# Altium PCB PCB1.PcbDoc
Units mil, origin at the board's own origin, x right, y up, seen from the top; angles counter-clockwise.
Board outline 3935 x 3935 mil, 4 copper layers (Top Layer, Layer 2, Layer 3, Bottom Layer), stack 71.573 mil thick; 112 components, 115 nets, 407 pads, 81 vias.
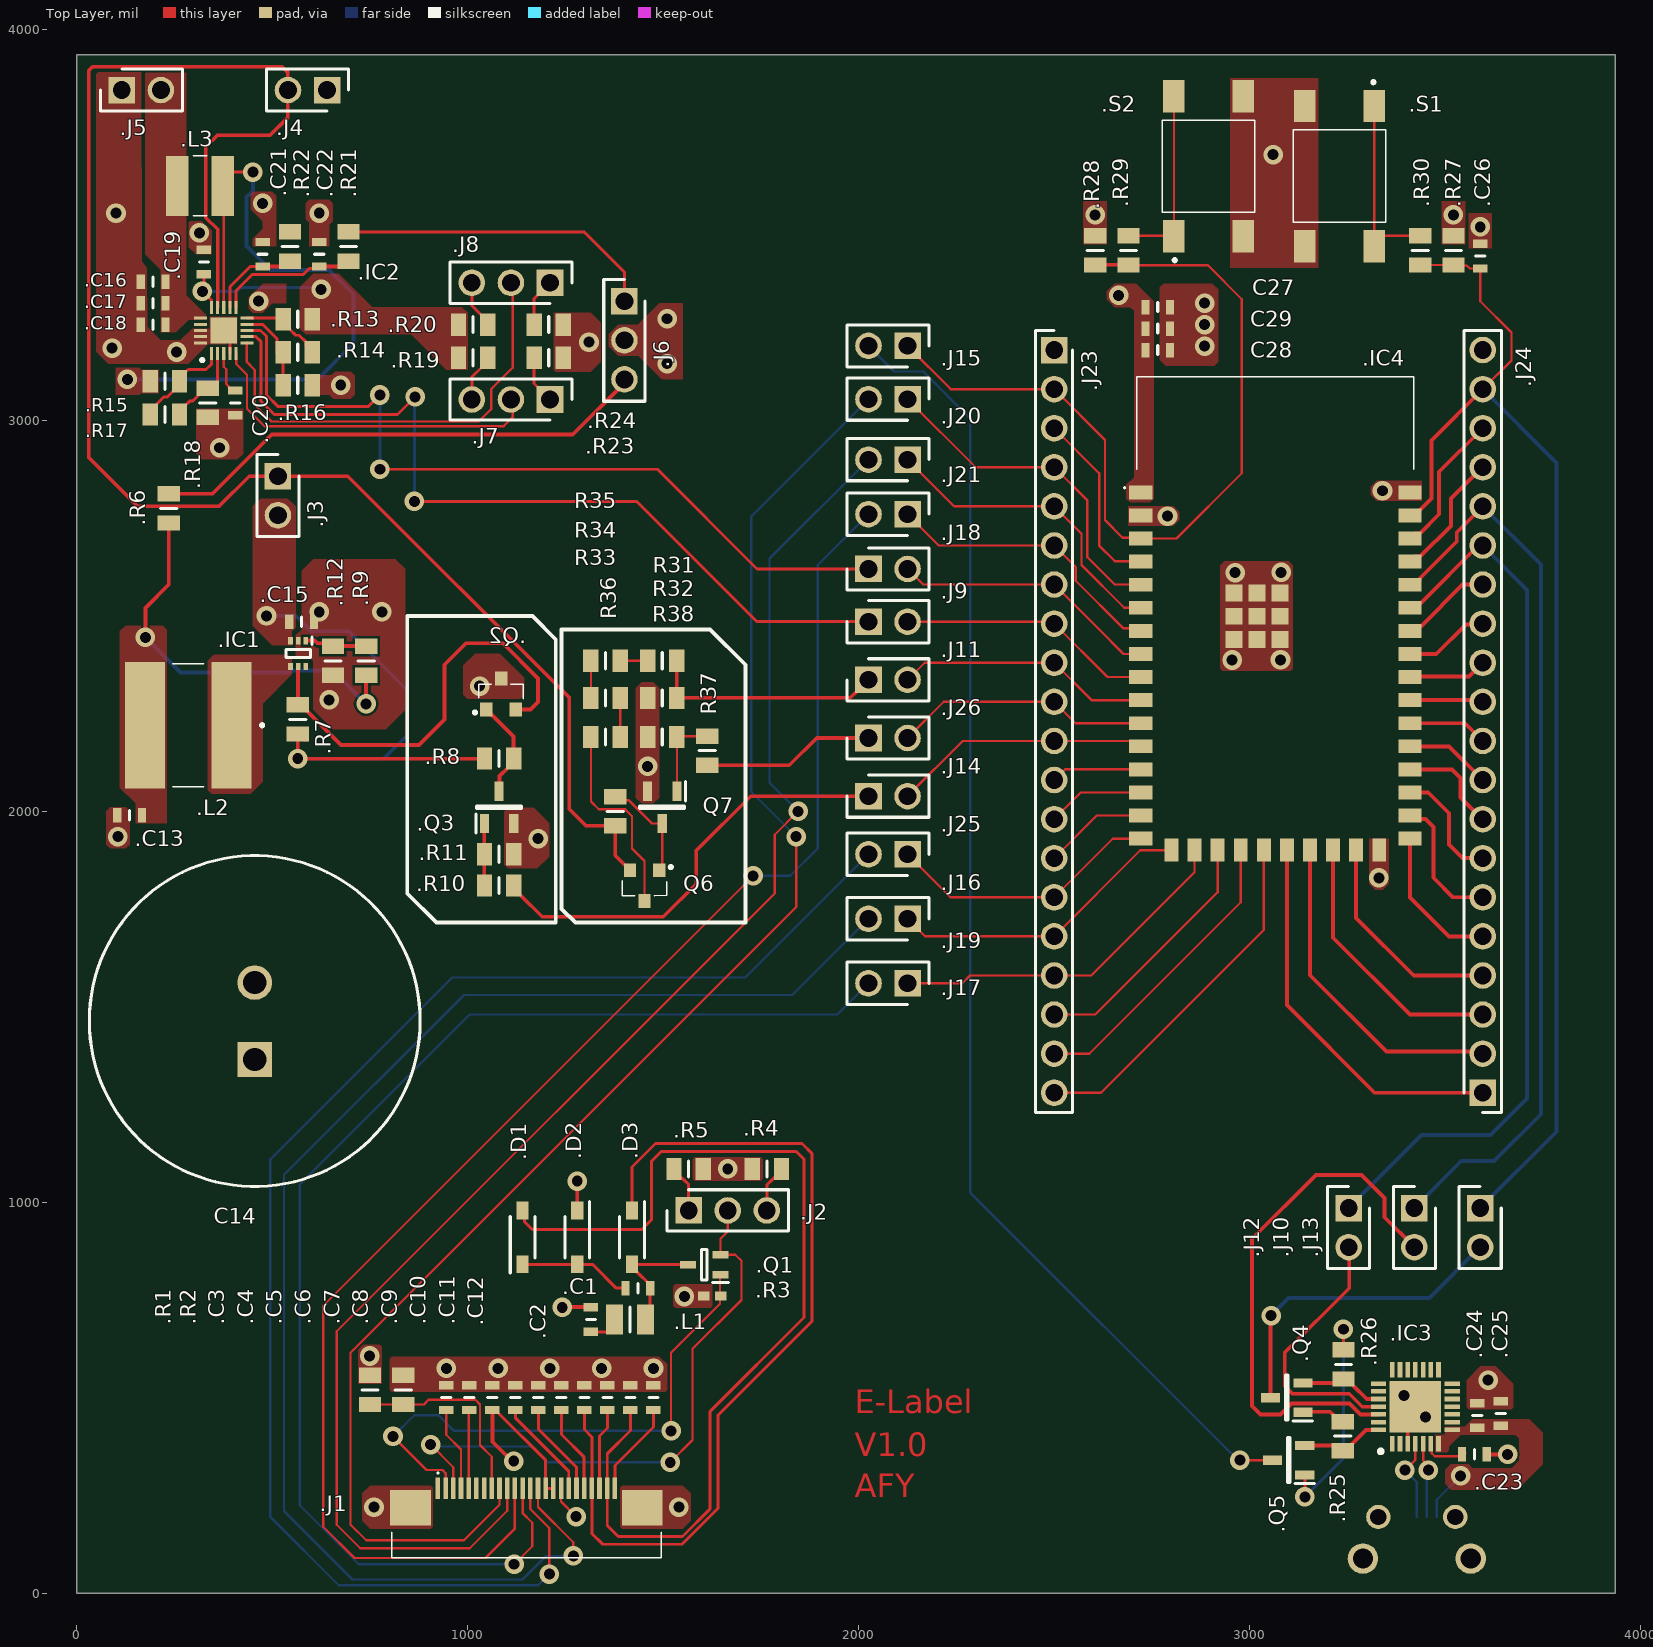
[diagram p0: Top Layer view]
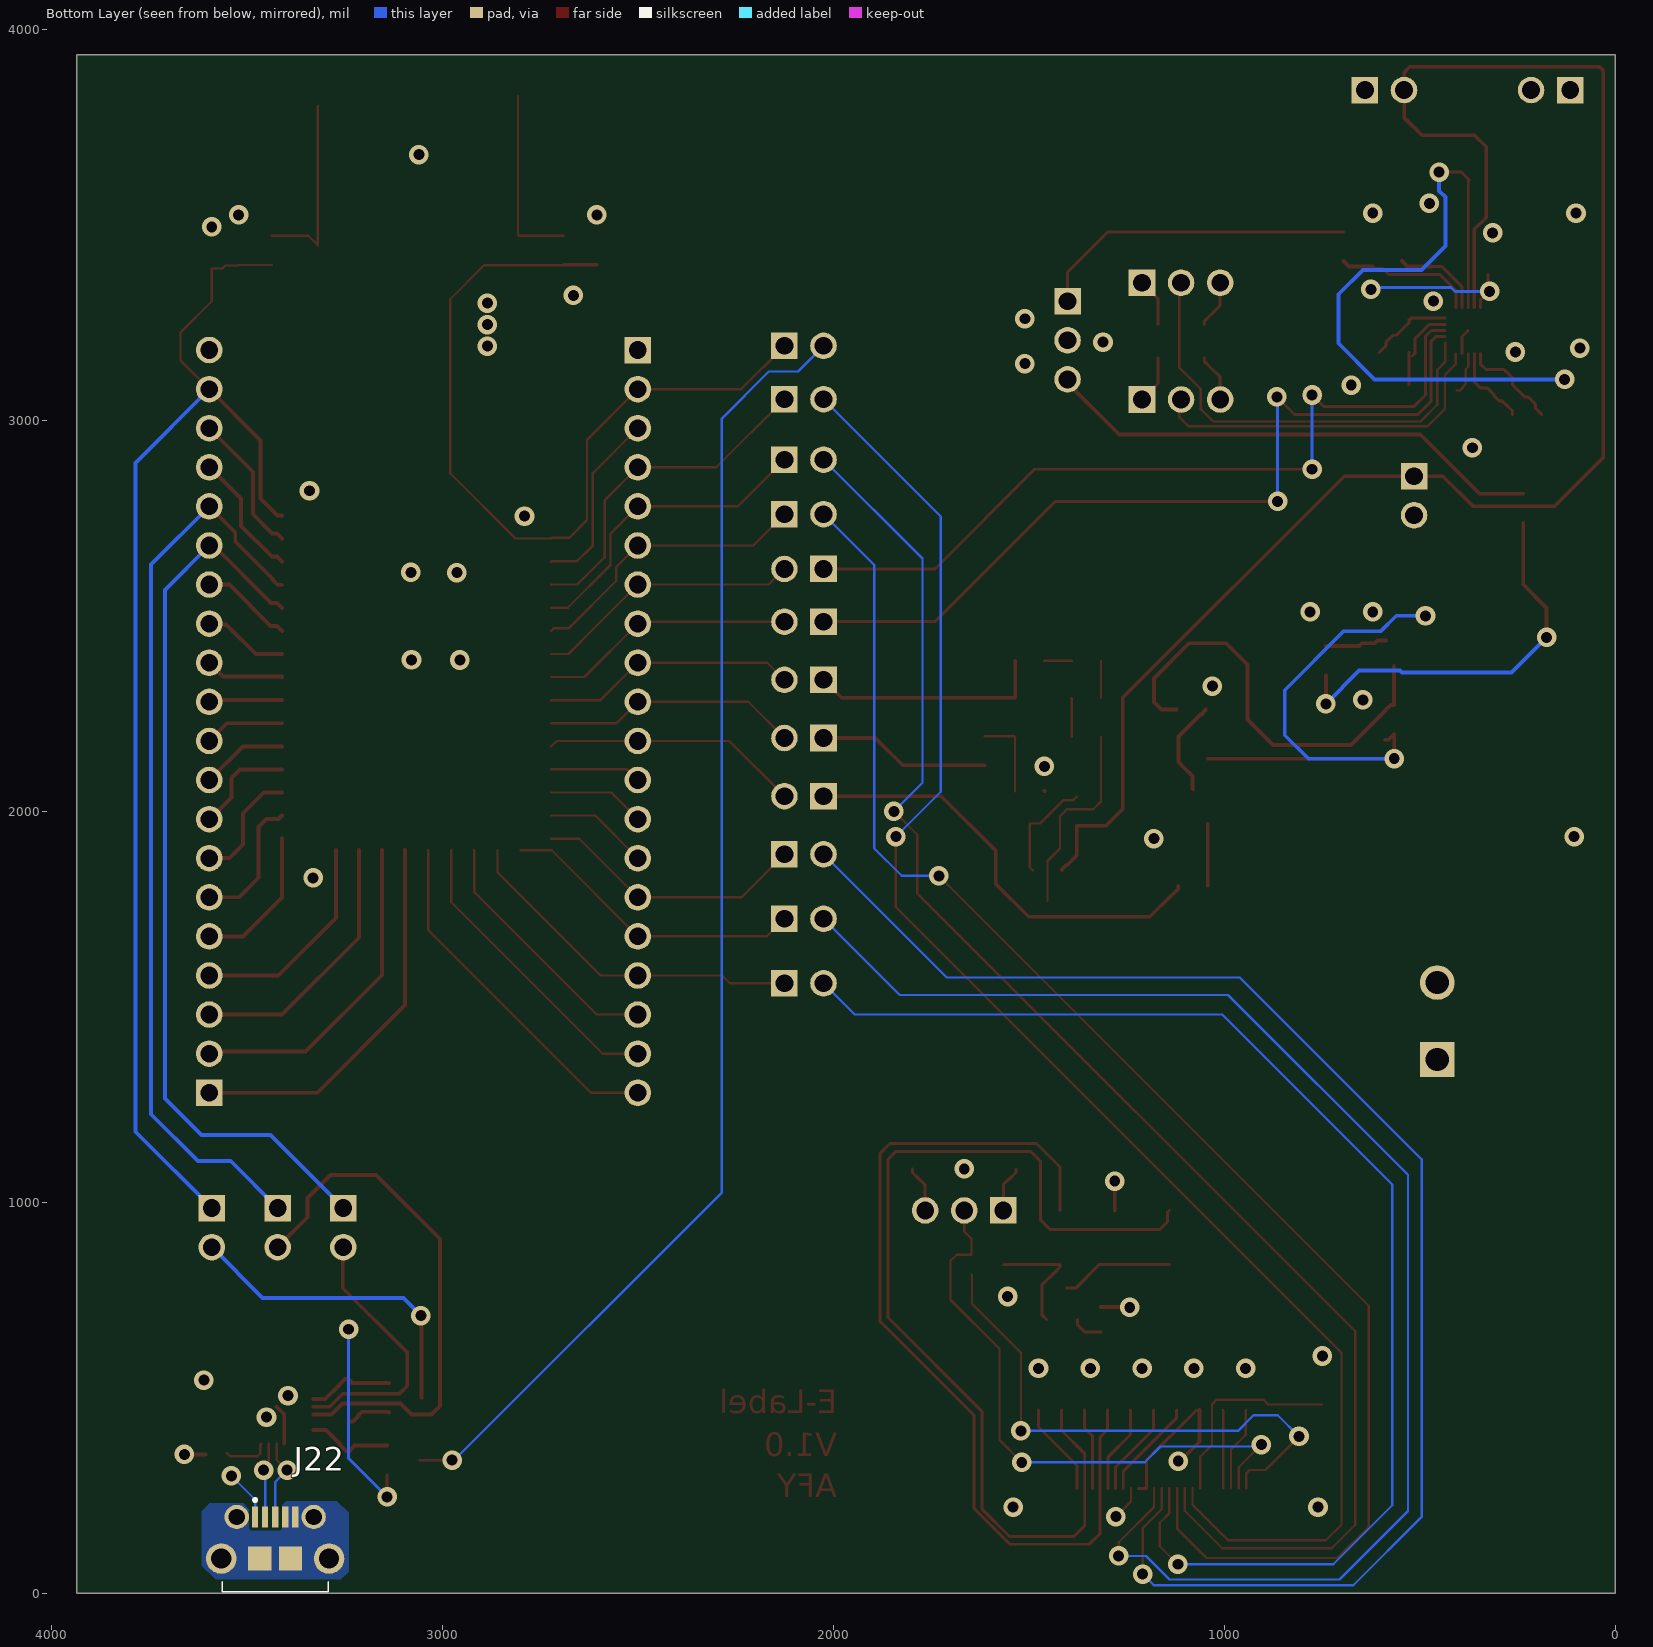
[diagram p1: Bottom Layer view, seen from below]
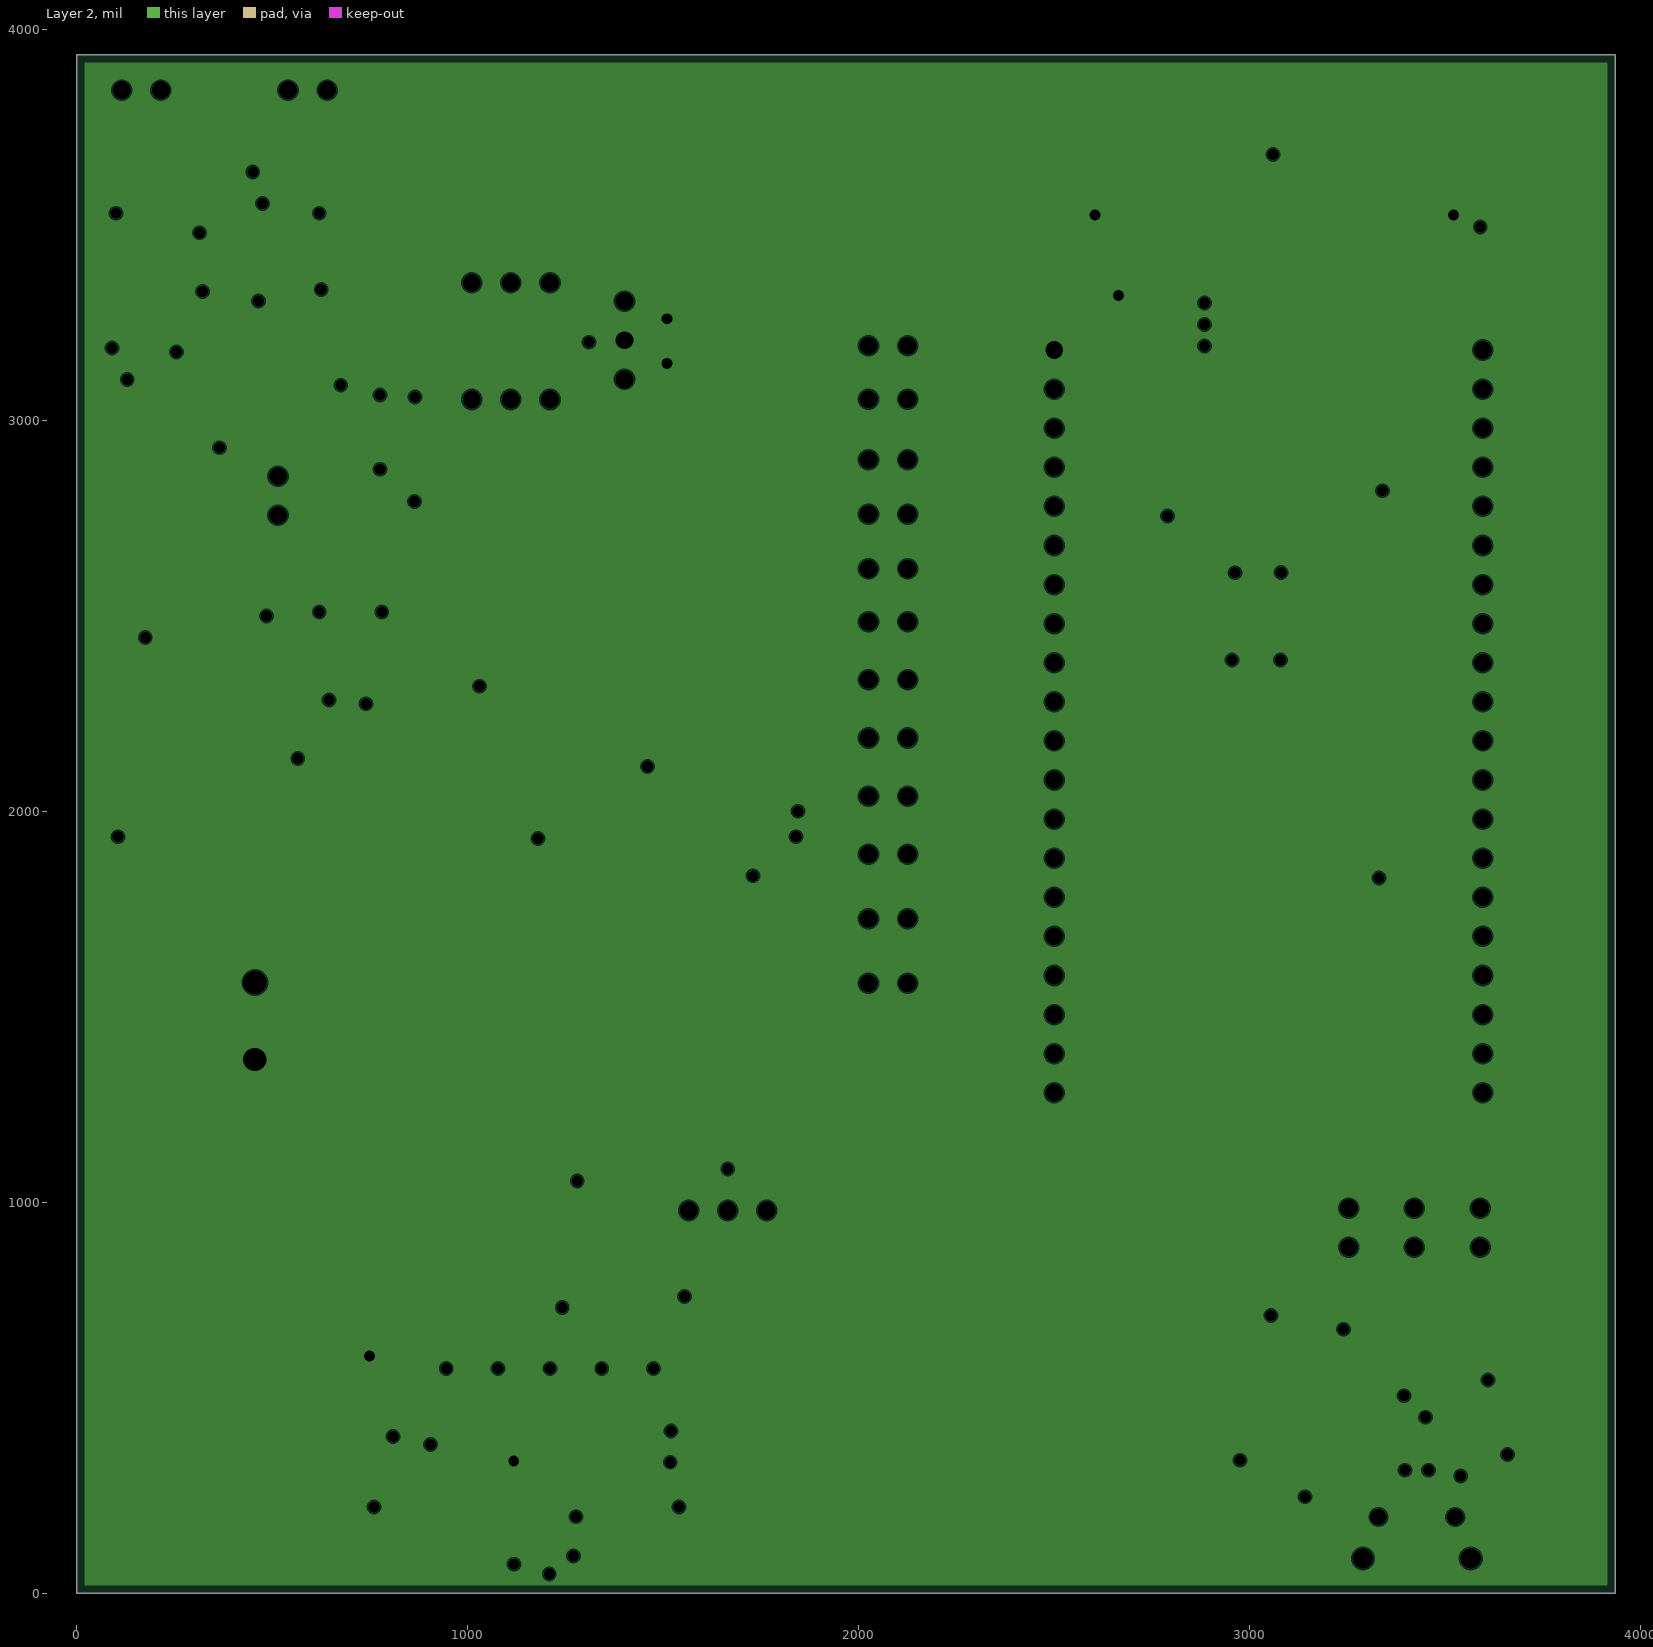
[diagram p2: Layer 2, clearances drawn from the general rule]
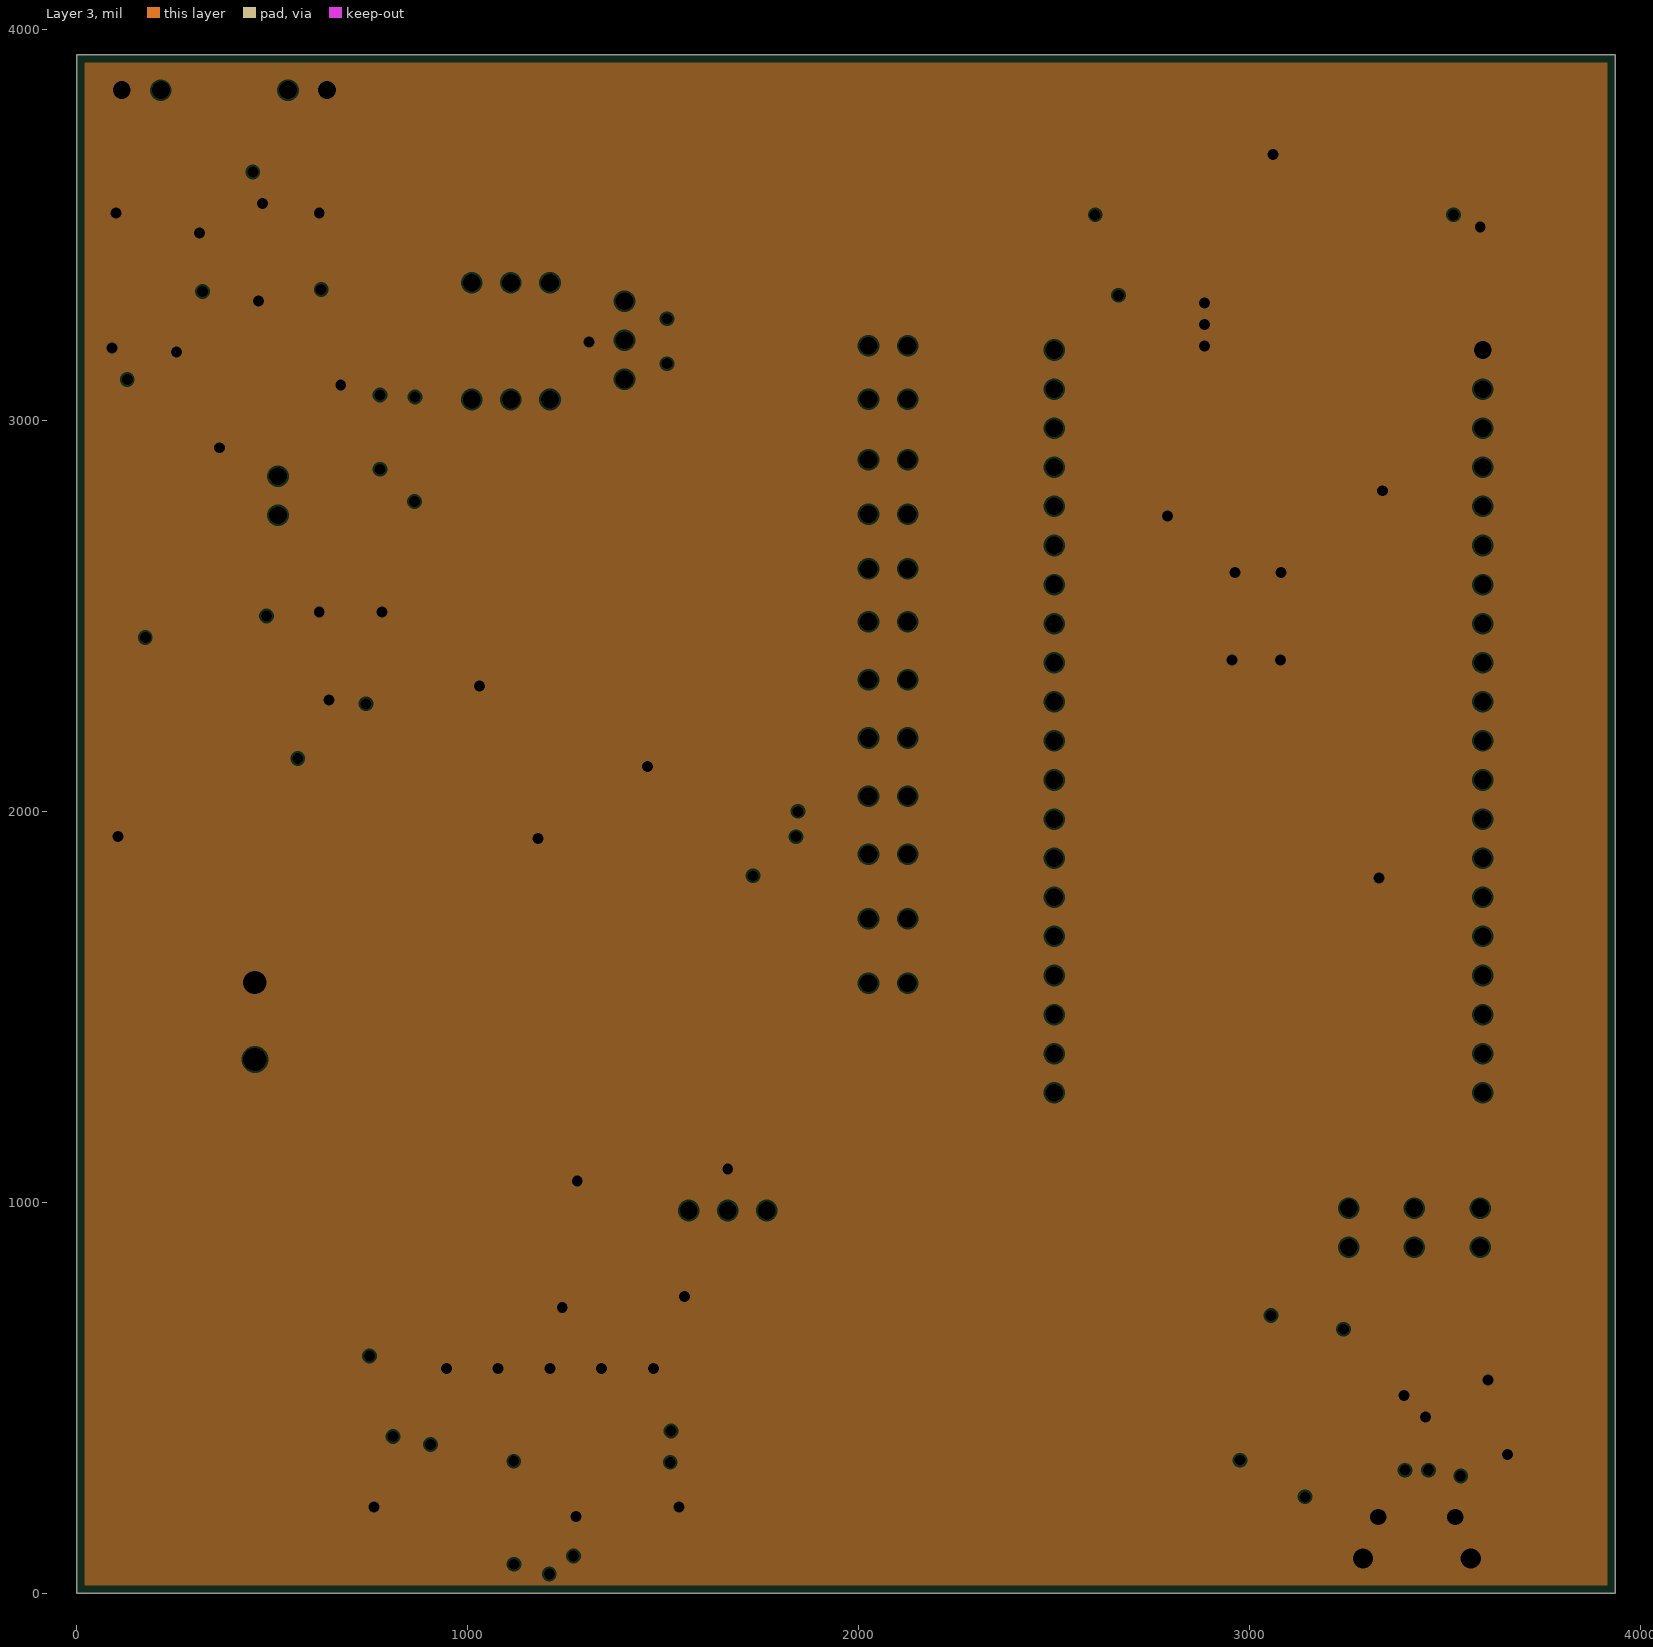
[diagram p3: Layer 3, clearances drawn from the general rule]
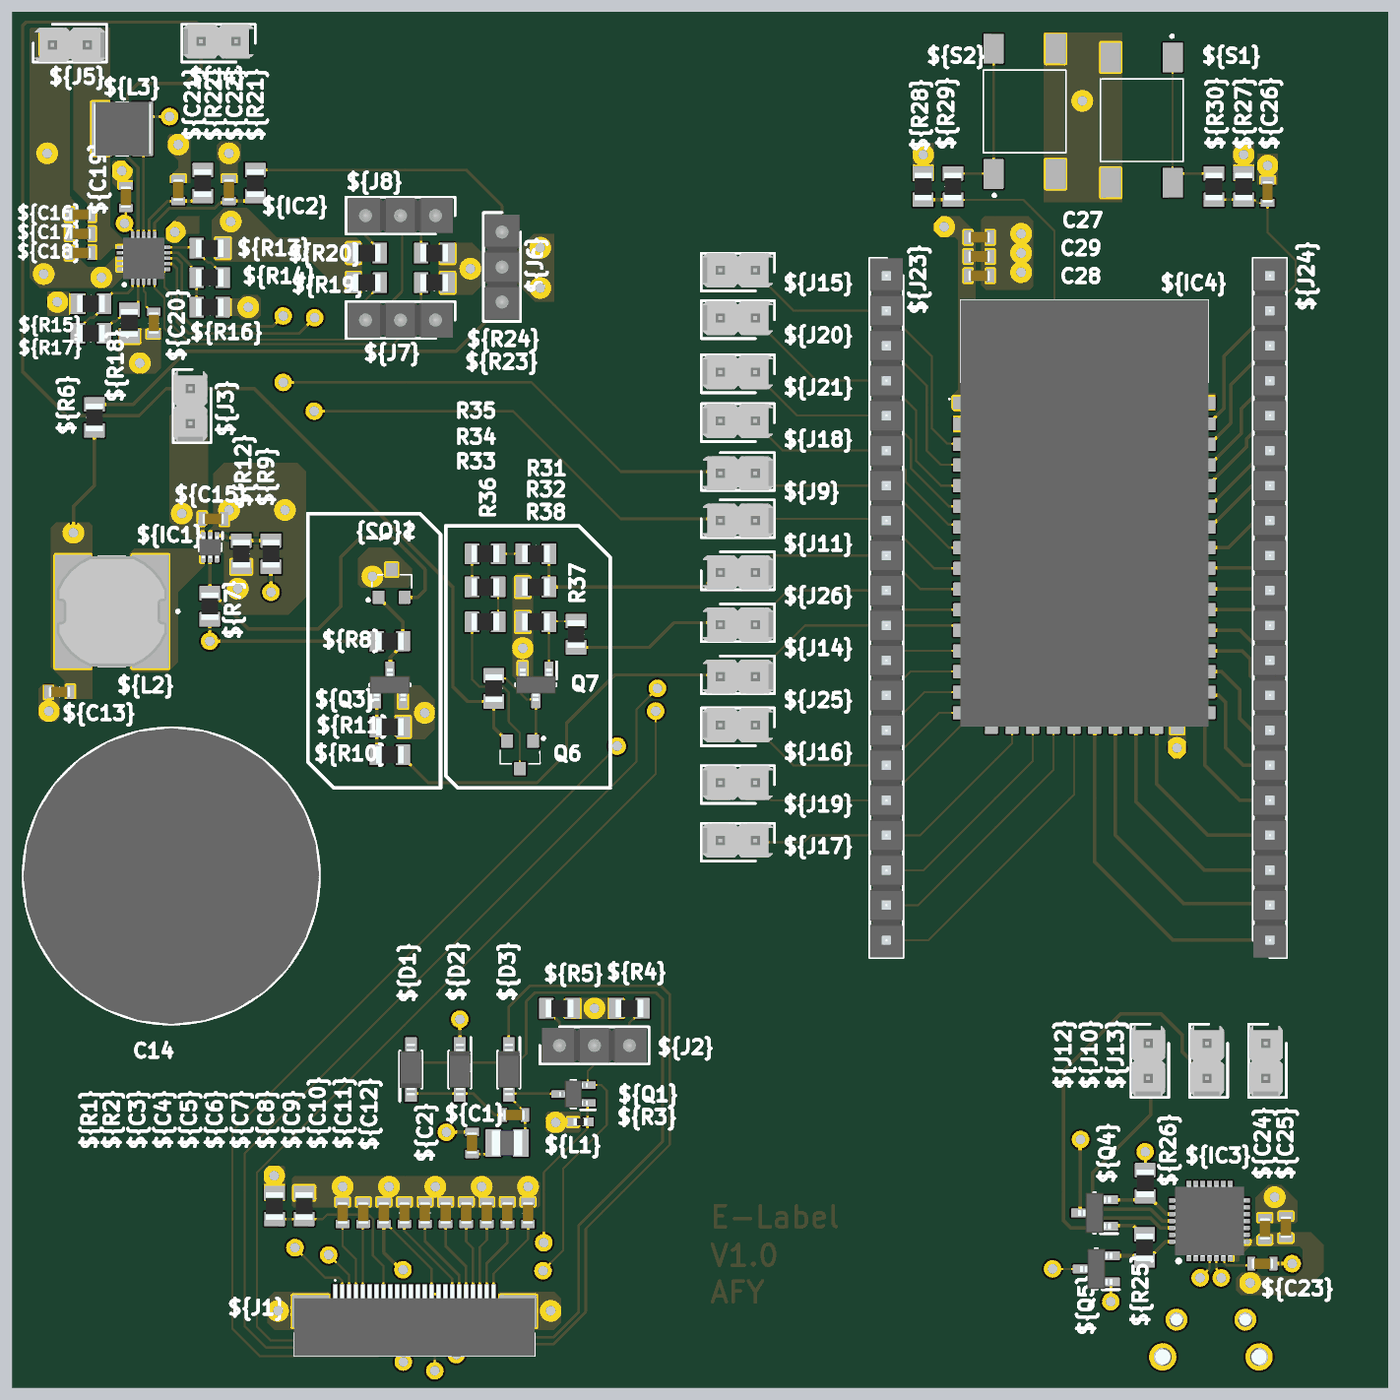
[diagram p4: 3D render of the assembled board from above, using the file's embedded part models]

## Layer stack, top to bottom
Top Solder: solder mask 0.4, Solder Resist, Dk 3.5
Top Layer: signal copper 1.378
Dielectric 2: prepreg 4.2, PP-014, Dk 4.2
Layer 2: plane copper 0.7087, net VDD_3V3
Dielectric 1: core 59, Core-043, Dk 4.3
Layer 3: plane copper 0.7087, net GND
Dielectric 3: prepreg 4.2, PP-014, Dk 4.2
Bottom Layer: signal copper 1.378
Bottom Solder: solder mask 0.4, Solder Resist, Dk 3.5

## Board outline
0,0 0,3935 3935,3935 3935,0

## Design rules (kind name [scope] priority, off if disabled: settings)
Clearance polygon [All] p1: gap=6 ignorepadtopadclearanceinfootprint=FALSE
Clearance polygon2SameNet [All] p2: gap=0 ignorepadtopadclearanceinfootprint=FALSE
Clearance [All] p3: gap=6 ignorepadtopadclearanceinfootprint=FALSE
MinimumSolderMaskSliver [All] p1: minsoldermaskwidth=1
NetAntennae [All] p1: netantennaetolerance=99999
PasteMaskExpansion [All] p1: expansion=1
PlaneClearance [All] p1: clearance=5
PlaneConnect [All] p1: planeconnectstyle=Direct reliefexpansion=20 reliefentries=4 reliefconductorwidth=10 reliefairgap=10
PolygonConnect [All] p1: connectstyle=Direct reliefconductorwidth=10 reliefentries=4 polygonreliefangle="90 Angle" airgapwidth=10
RoomDefinition 0_Top [InComponentClass('0_Top')] p1: confinementstyle=ConfineIn formatcopy=TRUE lockcomponents=FALSE outline 0,0 9085,0 9085,4410 0,4410
RoomDefinition U_P_Power [InComponentClass('U_P_Power')] p2: confinementstyle=ConfineIn formatcopy=TRUE lockcomponents=FALSE outline 0,0 0,4155 4185,4155 4185,0
RoomDefinition U_uC [InComponentClass('U_uC')] p3: confinementstyle=ConfineIn formatcopy=TRUE lockcomponents=FALSE outline 0,0 6660,0 6660,4240 0,4240
RoomDefinition U_B_E-Label [InComponentClass('U_B_E-Label')] p4: confinementstyle=ConfineIn formatcopy=TRUE lockcomponents=FALSE outline 699.65,442.09 699.65,597.91 1063.27,597.91 1063.27,1022.36 1488.27,1022.36 1488.27,1052.68 1492.09,1052.68 1492.09,1135.35 1837.91,1135.35 1837.91,1052.68 1841.73,1052.68 1841.73,905.12 1687.83,905.12 1687.83,775.87 1682.24,775.87 1682.24,727.36 1549.76,727.36 1549.76,39.41 750.24,39.41 750.24,442.09
RoomDefinition U_A_USB2Serial [InComponentClass('U_A_USB2Serial')] p5: confinementstyle=ConfineIn formatcopy=TRUE lockcomponents=FALSE outline 3008.23,419.33 3008.23,580.67 3189.65,580.67 3189.65,662.91 3290.35,662.91 3290.35,611.79 3559.12,611.79 3559.12,518.46 3677.6,518.46 3677.6,400.43 3664.02,400.43 3664.02,319.61 3655.31,319.61 3655.31,-45.98 3199.09,-45.98 3199.09,259.33 3013.23,259.33 3013.23,419.33
RoutingVias [All] p1: holewidth=28 width=50 viastyle="Through Hole" minholewidth=28 minwidth=50 maxholewidth=28 maxwidth=50
SilkToSolderMaskClearance [IsPad] p1: minsilkscreentomaskgap=5 clearancetoexposedcopper=TRUE
SolderMaskExpansion [All] p1: expansion=6 istentingtop=FALSE
Width [All] p1: maxlimit=12 minlimit=6 preferedwidth=6 minimp=50.000000 maximp=50.000000 favimp=50.000000
24 further rules are at their usual default settings.

## Classes and differential pairs
component class U_uC: 40 .C26 .IC4 .J23 .J24 .R27 .R28 .R29 .R30 .S1 .S2 C27 C28
component class U_B_E-Label: .C1 .C2 .C3 .C4 .C5 .C6 .C7 .C8 .C9 .C10 .C11 .C12 .D1 .D2 .D3 .J1 .J2 .L1 .Q1 .R1 .R2 .R3 .R4 .R5
component class U_A_USB2Serial: .C23 .C24 .C25 .IC3 .Q4 .Q5 .R25 .R26 J22
component class 0_Top: .J9 .J10 .J11 .J12 .J13 .J14 .J15 .J16 .J17 .J18 .J19 .J20 .J21 .J25 .J26
component class U_P_Power: 40 .C13 .C15 .C16 .C17 .C18 .C19 .C20 .C21 .C22 .IC1 .IC2 .J3 .J4 .J5 .J6 .J7 .J8 .L2 .L3 .Q2 .Q3 .R6 .R7 .R8 .R9 .R10 .R11 .R12 .R13 .R14 .R15 .R16 .R17 .R18 .R19 .R20 .R21 .R22 .R23 .R24 C14 Q6 Q7 R31 R32 R33 R34 R35 R36 R37 R38 U1

## Components (designator, comment, footprint, x,y, rotation, side; value= is the part's Value field where it differs from the comment)
.C1 "C_CER_226_0603" CAPC1608X90N 1435,780 r180 top (schematic designator C1)
.C2 "C_CER_226_0603" CAPC1608X90N 1315,700 r270 top (schematic designator C2)
.C3 "C_CER_226_0603" CAPC1608X90N 945,500 r270 top (schematic designator C3)
.C4 "C_CER_226_0603" CAPC1608X90N 1003.89,500 r270 top (schematic designator C4)
.C5 "C_CER_226_0603" CAPC1608X90N 1062.78,500 r270 top (schematic designator C5)
.C6 "C_CER_226_0603" CAPC1608X90N 1121.67,500 r270 top (schematic designator C6)
.C7 "C_CER_226_0603" CAPC1608X90N 1180.56,500 r270 top (schematic designator C7)
.C8 "C_CER_226_0603" CAPC1608X90N 1239.44,500 r270 top (schematic designator C8)
.C9 "C_CER_226_0603" CAPC1608X90N 1298.33,500 r270 top (schematic designator C9)
.C10 "C_CER_226_0603" CAPC1608X90N 1357.22,500 r270 top (schematic designator C10)
.C11 "C_CER_226_0603" CAPC1608X90N 1416.11,500 r270 top (schematic designator C11)
.C12 "C_CER_226_0603" CAPC1608X90N 1475,500 r270 top (schematic designator C12)
.C13 "C_CER_226_0603" CAPC1608X90N 135,1990 r0 top (schematic designator C13)
.C15 "C1608X7S1A475K080AC" CAPC1608X90N 575,2485 r180 top (schematic designator C15)
.C16 "C_CER_226_0603" CAPC1608X90N 195,3355 r0 top (schematic designator C16)
.C17 "C_CER_226_0603" CAPC1608X90N 195,3300 r0 top (schematic designator C17)
.C18 "C_CER_226_0603" CAPC1608X90N 195,3245 r0 top (schematic designator C18)
.C19 "C_CER_226_0603" CAPC1608X90N 325,3405 r270 top (schematic designator C19)
.C20 "C_CER_226_0603" CAPC1608X90N 405,3045 r90 top (schematic designator C20)
.C21 "C_CER_226_0603" CAPC1608X90N 475,3425 r270 top (schematic designator C21)
.C22 "C_CER_226_0603" CAPC1608X90N 620,3425 r270 top (schematic designator C22)
.C23 "C_CER_226_0603" CAPC1608X90N 3575,355 r180 top (schematic designator C23)
.C24 "C_CER_226_0603" CAPC1608X90N 3582.2,454.45 r270 top (schematic designator C24)
.C25 "C_CER_226_0603" CAPC1608X90N 3642.2,459.45 r270 top (schematic designator C25)
.C26 "C_CER_226_0603" CAPC1608X90N 3590,3420 r270 top (schematic designator C26)
.D1 "MBR0530T1G" SOD3716X135N 1140,910 r90 top (schematic designator D1)
.D2 "MBR0530T1G" SOD3716X135N 1280,910 r270 top (schematic designator D2)
.D3 "MBR0530T1G" SOD3716X135N 1420,910 r270 top (schematic designator D3)
.IC1 "TLV62569ADRLR" SOTFL50P160X60-6N 566.04,2403.55 r270 top (schematic designator IC1)
.IC2 "SPV1050TTR" QFN40P300X300X100-21N-D 375.75,3230 r90 top (schematic designator IC2)
.IC3 "CP2102-GMR_28Pin" QFN50P500X500X100-29N-D 3424.12,476.79 r90 top (schematic designator IC3)
.IC4 "ESP32-S2-WROVER_M22S2H3216PH3Q0_" ESP32S2WROVERM22S2H3216PH3Q0 2721.42,1930 r0 top (schematic designator IC4)
.J1 "SFV24R-4STE1HLF" SFV24R4STE1HLF 1150,200 r0 top (schematic designator J1)
.J2 "61300311121" HDRV3W95P0X254_1X3_762X254X869P 1565,978.9 r0 top (schematic designator J2)
.J3 "22-28-4027" HDRV2W66P0X254_1X2_508X249X1067P 514.37,2857.39 r270 top (schematic designator J3)
.J4 "22-28-4027" HDRV2W66P0X254_1X2_508X249X1067P 640,3845 r180 top (schematic designator J4)
.J5 "22-28-4027" HDRV2W66P0X254_1X2_508X249X1067P 115,3845 r0 top (schematic designator J5)
.J6 "61300311121" HDRV3W95P0X254_1X3_762X254X869P 1400.77,3304.84 r270 top (schematic designator J6)
.J7 "61300311121" HDRV3W95P0X254_1X3_762X254X869P 1210.32,3053.43 r180 top (schematic designator J7)
.J8 "61300311121" HDRV3W95P0X254_1X3_762X254X869P 1210.32,3352.03 r180 top (schematic designator J8)
.J9 "22-28-4027" HDRV2W66P0X254_1X2_508X249X1067P 2025,2620 r0 top (schematic designator J9)
.J10 "22-28-4027" HDRV2W66P0X254_1X2_508X249X1067P 3421.49,985 r270 top (schematic designator J10)
.J11 "22-28-4027" HDRV2W66P0X254_1X2_508X249X1067P 2025,2485 r0 top (schematic designator J11)
.J12 "22-28-4027" HDRV2W66P0X254_1X2_508X249X1067P 3253.24,985 r270 top (schematic designator J12)
.J13 "22-28-4027" HDRV2W66P0X254_1X2_508X249X1067P 3589.73,985 r270 top (schematic designator J13)
.J14 "22-28-4027" HDRV2W66P0X254_1X2_508X249X1067P 2025,2187.5 r0 top (schematic designator J14)
.J15 "22-28-4027" HDRV2W66P0X254_1X2_508X249X1067P 2125,3190.59 r180 top (schematic designator J15)
.J16 "22-28-4027" HDRV2W66P0X254_1X2_508X249X1067P 2125,1890 r180 top (schematic designator J16)
.J17 "22-28-4027" HDRV2W66P0X254_1X2_508X249X1067P 2125,1560 r180 top (schematic designator J17)
.J18 "22-28-4027" HDRV2W66P0X254_1X2_508X249X1067P 2125,2760 r180 top (schematic designator J18)
.J19 "22-28-4027" HDRV2W66P0X254_1X2_508X249X1067P 2125,1725 r180 top (schematic designator J19)
.J20 "22-28-4027" HDRV2W66P0X254_1X2_508X249X1067P 2125,3054.25 r180 top (schematic designator J20)
.J21 "22-28-4027" HDRV2W66P0X254_1X2_508X249X1067P 2125,2899.47 r180 top (schematic designator J21)
.J23 "10129378-920001BLF" HDRV20W67P0X254_1X20_5080X241X858P 2500,3180 r270 top (schematic designator J23)
.J24 "10129378-920001BLF" HDRV20W67P0X254_1X20_5080X241X858P 3596.42,1280 r90 top (schematic designator J24)
.J25 "22-28-4027" HDRV2W66P0X254_1X2_508X249X1067P 2025,2038.75 r0 top (schematic designator J25)
.J26 "22-28-4027" HDRV2W66P0X254_1X2_508X249X1067P 2025,2336.25 r0 top (schematic designator J26)
.L1 "LB2016T680K" INDC2218X180N 1415,700 r0 top (schematic designator L1)
.L2 "SRN8040-1R0Y" SRN80408R2Y 285,2220 r180 top (schematic designator L2)
.L3 "LPS4018-223MRC" LPS4018223MRC 315,3600 r180 top (schematic designator L3)
.Q1 "Si1308EDL-T1-GE3" SOT65P210X110-3N 1605,840 r180 top (schematic designator Q1)
.Q2 "BC858CLT3G" BC858CLT3G 1085,2300 r0 top (schematic designator Q2)
.Q3 "BC858BLT3G" SOT96P237X111-3N 1080,2010 r90 top (schematic designator Q3)
.Q4 "BC858BLT3G" SOT96P237X111-3N 3095,500 r180 top (schematic designator Q4)
.Q5 "BC858BLT3G" SOT96P237X111-3N 3100,340 r180 top (schematic designator Q5)
.R1 "NC_R_0805" RESC2012X55N 750,520 r90 top (schematic designator R1)
.R2 "R_0805" RESC2012X55N 835,520 r270 top (schematic designator R2)
.R3 "k" RESC1005X40N 1625,760 r180 top (schematic designator R3)
.R4 "R_0805" RESC2012X55N 1765,1085 r0 top (schematic designator R4)
.R5 "R_0805" RESC2012X55N 1565,1085 r180 top (schematic designator R5)
.R6 "R_0805" RESC2012X55N 235,2775 r90 top (schematic designator R6)
.R7 "R_0805" RESC2012X55N 565,2235 r270 top (schematic designator R7)
.R8 "R_0805" RESC2012X55N 1080,2135 r180 top (schematic designator R8)
.R9 "R_0805" RESC2012X55N 740,2385 r270 top (schematic designator R9)
.R10 "R_0805" RESC2012X55N 1080,1810 r180 top (schematic designator R10)
.R11 "R_0805" RESC2012X55N 1080,1890 r0 top (schematic designator R11)
.R12 "R_0805" RESC2012X55N 655,2385 r90 top (schematic designator R12)
.R13 "R_0805" RESC2012X55N 565,3258.5 r180 top (schematic designator R13)
.R14 "R_0805" RESC2012X55N 565,3174.25 r180 top (schematic designator R14)
.R15 "R_0805" RESC2012X55N 225,3100 r180 top (schematic designator R15)
.R16 "R_0805" RESC2012X55N 565,3090 r0 top (schematic designator R16)
.R17 "R_0805" RESC2012X55N 225,3015 r180 top (schematic designator R17)
.R18 "R_0805" RESC2012X55N 335,3045 r270 top (schematic designator R18)
.R19 "R_0805" RESC2012X55N 1013.57,3160 r180 top (schematic designator R19)
.R20 "R_0805" RESC2012X55N 1013.57,3245 r180 top (schematic designator R20)
.R21 "R_0805" RESC2012X55N 695,3445 r90 top (schematic designator R21)
.R22 "R_0805" RESC2012X55N 545,3445 r90 top (schematic designator R22)
.R23 "R_0805" RESC2012X55N 1207.08,3160 r180 top (schematic designator R23)
.R24 "R_0805" RESC2012X55N 1207.08,3245 r180 top (schematic designator R24)
.R25 "R_0805" RESC2012X55N 3238,401.44 r270 top (schematic designator R25)
.R26 "R_0805" RESC2012X55N 3240,585 r270 top (schematic designator R26)
.R27 "R_0805" RESC2012X55N 3521.42,3435 r90 top (schematic designator R27)
.R28 "R_0805" RESC2012X55N 2605,3435 r90 top (schematic designator R28)
.R29 "R_0805" RESC2012X55N 2690,3435 r270 top (schematic designator R29)
.R30 "R_0805" RESC2012X55N 3436.42,3435 r270 top (schematic designator R30)
.S1 "LL3301NF065QG" LL3301NF065QG 3230,3625 r270 top (schematic designator S1)
.S2 "LL3301NF065QG" LL3301NF065QG 2895,3650 r90 top (schematic designator S2)
C14 "DB-5R5D105T" CAPPRD500W130D2150H800 455,1365 r90 top
C27 "C1608X7S1A475K080AC" CAPC1608X90N 2765,3290 r180 top
C28 "C_CER_226_0603" CAPC1608X90N 2765,3180 r180 top
C29 "C_CER_226_0603" CAPC1608X90N 2765,3235 r180 top
J22 "10118194-0011LF" 101181940011LF 3427.76,122.92 r180 bottom
Q6 "BC858CLT3G" BC858CLT3G 1452.4,1810 r180 top
Q7 "BC858BLT3G" SOT96P237X111-3N 1497.4,2010 r270 top
R31 "R_0805" RESC2012X55N 1497.4,2385 r180 top
R32 "R_0805" RESC2012X55N 1497.4,2290 r0 top
R33 "R_0805" RESC2012X55N 1352.4,2190 r180 top
R34 "R_0805" RESC2012X55N 1352.4,2290 r0 top
R35 "R_0805" RESC2012X55N 1352.4,2385 r180 top
R36 "R_0805" RESC2012X55N 1377.4,2000 r270 top
R37 "R_0805" RESC2012X55N 1612.4,2155 r270 top
R38 "R_0805" RESC2012X55N 1497.4,2190 r180 top

## Footprints (in the part's own frame and the unit in brackets; to place one, negate y for a bottom-side part, rotate by r counter-clockwise, add the part's x,y. Pads: shape width x height; smd on the part's side, far side on the other; paste and mask are expansions set on the pad)
101181940011LF [mm]
  rect 0.4x1.35 smd mask+0.102: 1(-1.3,1.825) 2(-0.65,1.825) 3(0,1.825) 4(0.65,1.825) 5(1.3,1.825)
  round 1.582 hole 1.055: 6(-2.5,1.825) 7(2.5,1.825)
  round 1.98 hole 1.32: 8(-3.5,-0.875) 9(3.5,-0.875)
  rect 1.5x1.55 smd: 10(-1,-0.875) 11(1,-0.875)
  silkscreen extent -3.45,-3.03 3.45,3.02, body extent -4.06,-3.03 4.06,2.46, height 2.1
BC858CLT3G [mm]
  rect 0.8x0.9 smd: 1(-0.95,-1) 2(0.95,-1) 3(0.01,1)
  silkscreen extent -1.8,-1.3 1.45,0.65
CAPC1608X90N [mm]
  rect 0.54x0.94 smd: 1(-0.8,0) 2(0.8,0)
  silkscreen extent 0,-0.3 0,0.3, body extent -0.8,-0.4 0.8,0.4, height 0.9
CAPPRD500W130D2150H800 [mm]
  rect 2.25x2.25 hole 1.5: 1(0,0)
  round 2.25 hole 1.5: 2(5,0)
  silkscreen extent -8.25,-10.75 13.25,10.75, body extent -8.25,-10.75 13.25,10.75, height 8
ESP32S2WROVERM22S2H3216PH3Q0 [mm]
  rect 1.5x0.9 smd: 1(0,22.5) 2(0,21) 3(0,19.5) 4(0,18) 5(0,16.5) 6(0,15) 7(0,13.5) 8(0,12) 9(0,10.5) 10(0,9) 11(0,7.5) 12(0,6) 13(0,4.5) 14(0,3) 15(0,1.5) 16(0,0) 27(17.5,0) 28(17.5,1.5) 29(17.5,3) 30(17.5,4.5) 31(17.5,6) 32(17.5,7.5) 33(17.5,9) 34(17.5,10.5) 35(17.5,12) 36(17.5,13.5) 37(17.5,15) 38(17.5,16.5) 39(17.5,18) 40(17.5,19.5) 41(17.5,21) 42(17.5,22.5)
  rect 0.9x1.5 smd: 17(2,-0.75) 18(3.5,-0.75) 19(5,-0.75) 20(6.5,-0.75) 21(8,-0.75) 22(9.5,-0.75) 23(11,-0.75) 24(12.5,-0.75) 25(14,-0.75) 26(15.5,-0.75)
  rect 1.1x1.1 smd: 43(7.56,14.45) 44(9.06,14.45) 45(9.06,15.95) 46(7.56,15.95) 47(6.06,15.95) 48(6.06,14.45) 49(6.06,12.95) 50(7.56,12.95) 51(9.06,12.95)
  silkscreen extent -1.1,22.75 17.75,30, body extent -0.25,-1 17.75,30, height 3.55
HDRV2W66P0X254_1X2_508X249X1067P [mm]
  rect 1.725x1.725 hole 1.15: 1(0,0)
  round 1.725 hole 1.15: 2(2.54,0)
  silkscreen extent -1.4,-1.37 3.94,1.37, body extent -1.27,-1.37 3.81,1.12, height 10.54
HDRV3W95P0X254_1X3_762X254X869P [mm]
  rect 1.725x1.725 hole 1.15: 1(0,0)
  round 1.725 hole 1.15: 2(2.54,0) 3(5.08,0)
  silkscreen extent -1.42,-1.35 6.5,1.35, body extent -1.27,-1.27 6.35,1.27, height 8.69
HDRV20W67P0X254_1X20_5080X241X858P [mm]
  rect 1.725x1.725 hole 1.15: 1(0,0)
  round 1.725 hole 1.15: 2(2.54,0) 3(5.08,0) 4(7.62,0) 5(10.16,0) 6(12.7,0) 7(15.24,0) 8(17.78,0) 9(20.32,0) 10(22.86,0) 11(25.4,0) 12(27.94,0) 13(30.48,0) 14(33.02,0) 15(35.56,0) 16(38.1,0) 17(40.64,0) 18(43.18,0) 19(45.72,0) 20(48.26,0)
  silkscreen extent -1.27,-1.2 49.53,1.2, body extent -1.27,-1.2 49.53,1.2, height 8.58
INDC2218X180N [mm]
  rect 1.1x1.95 smd: 1(-1,0) 2(1,0)
  silkscreen extent 0,-0.8 0,0.8, body extent -1.1,-0.9 1.1,0.9, height 1.8
LL3301NF065QG [mm]
  rect 2.1x1.4 smd: 1(-4.55,2.25) 2(4.55,2.25) 3(-4.55,-2.25) 4(4.55,-2.25)
  silkscreen extent -6.2,-3 3,3
LPS4018223MRC [mm]
  rect 1.45x3.89 smd: 1(-1.475,0) 2(1.475,0)
  silkscreen extent -0.45,-1.95 0.45,1.95, body extent -2.06,-1.95 2.06,1.95, height 1.9
QFN40P300X300X100-21N-D [mm]
  rect 0.85x0.2 smd: 1(-1.5,0.8) 2(-1.5,0.4) 3(-1.5,0) 4(-1.5,-0.4) 5(-1.5,-0.8) 11(1.5,-0.8) 12(1.5,-0.4) 13(1.5,0) 14(1.5,0.4) 15(1.5,0.8)
  rect 0.2x0.85 smd: 6(-0.8,-1.5) 7(-0.4,-1.5) 8(0,-1.5) 9(0.4,-1.5) 10(0.8,-1.5) 16(0.8,1.5) 17(0.4,1.5) 18(0,1.5) 19(-0.4,1.5) 20(-0.8,1.5)
  rect 1.7x1.7 smd: 21(0,0)
  silkscreen extent -2.02,1.3 -1.83,1.5, body extent -1.55,-1.55 1.55,1.55, height 1
QFN50P500X500X100-29N-D [mm]
  rect 1x0.3 smd: 1(-2.4,1.5) 2(-2.4,1) 3(-2.4,0.5) 4(-2.4,0) 5(-2.4,-0.5) 6(-2.4,-1) 7(-2.4,-1.5) 15(2.4,-1.5) 16(2.4,-1) 17(2.4,-0.5) 18(2.4,0) 19(2.4,0.5) 20(2.4,1) 21(2.4,1.5)
  rect 0.3x1 smd: 8(-1.5,-2.4) 9(-1,-2.4) 10(-0.5,-2.4) 11(0,-2.4) 12(0.5,-2.4) 13(1,-2.4) 14(1.5,-2.4) 22(1.5,2.4) 23(1,2.4) 24(0.5,2.4) 25(0,2.4) 26(-0.5,2.4) 27(-1,2.4) 28(-1.5,2.4)
  rect 3.35x3.35 smd: 29(0,0)
  silkscreen extent -3.02,2.12 -2.78,2.37, body extent -2.55,-2.55 2.55,2.55, height 1
RESC1005X40N [mm]
  rect 0.75x0.6 smd: 1(-0.55,0) 2(0.55,0)
  body extent -0.5,-0.25 0.5,0.25, height 0.4
RESC2012X55N [mm]
  rect 1x1.45 smd: 1(-0.95,0) 2(0.95,0)
  silkscreen extent 0,-0.53 0,0.53, body extent -1,-0.63 1,0.63, height 0.55
SFV24R4STE1HLF [mm]
  rect 0.3x1.4 smd: 1(-5.75,1.725) 2(-5.25,1.725) 3(-4.75,1.725) 4(-4.25,1.725) 5(-3.75,1.725) 6(-3.25,1.725) 7(-2.75,1.725) 8(-2.25,1.725) 9(-1.75,1.725) 10(-1.25,1.725) 11(-0.75,1.725) 12(-0.25,1.725) 13(0.25,1.725) 14(0.75,1.725) 15(1.25,1.725) 16(1.75,1.725) 17(2.25,1.725) 18(2.75,1.725) 19(3.25,1.725) 20(3.75,1.725) 21(4.25,1.725) 22(4.75,1.725) 23(5.25,1.725) 24(5.75,1.725)
  rect 2.65x2.3 smd: 25(-7.525,0.475) 26(7.525,0.475)
  silkscreen extent -8.75,-2.78 8.75,2.77, body extent -8.75,-2.78 8.75,2.39, height 2.1
SOD3716X135N [mm]
  rect 1.15x0.8 smd: 1(-1.75,0) 2(1.75,0)
  silkscreen extent -2.32,-0.8 1.35,0.8, body extent -1.86,-0.8 1.86,0.8, height 1.35
SOT65P210X110-3N [mm]
  rect 1.05x0.5 smd: 1(-1.05,0.65) 2(-1.05,-0.65) 3(1.05,0)
  silkscreen extent -1.58,-1 0.18,1.15, body extent -1.05,-1 1.05,1, height 1.1
SOT96P237X111-3N [mm]
  rect 1.25x0.6 smd: 1(-1.05,0.955) 2(-1.05,-0.955) 3(1.05,0)
  silkscreen extent -1.68,-1.46 0.08,1.51, body extent -1.18,-1.46 1.18,1.46, height 1.11
SOTFL50P160X60-6N [mm]
  rect 0.475x0.3 smd: 1(-0.838,0.5) 2(-0.838,0) 3(-0.838,-0.5) 4(0.838,-0.5) 5(0.838,0) 6(0.838,0.5)
  silkscreen extent -1.07,-0.8 0.25,0.9, body extent -0.8,-0.8 0.8,0.8, height 0.6
SRN80408R2Y [mm]
  rect 2.6x8.2 smd: 1(-2.8,0) 2(2.8,0)
  silkscreen extent -4.9,-4 1,4, body extent -4,-4 4,4, height 4

## Part data
.C1 .C2 .C3 .C4 .C5 .C6 .C7 .C8 .C9 .C10 .C11 .C12 .C13 .C16 .C17 .C18 .C19 .C20 .C21 .C22 .C23 .C24 .C25 .C26 C28 C29: Manufacturer_Part_Number=GRM188R60J226MEA0D, Copyright="Copyright (C) 2015 Accelerated Designs. All rights reserved", RefDes=RefDes, SourceLibrary=Murata_2014-12-31, Type=DEV, Vendor=Murata
.C15 C27: "Capacitor", Manufacturer_Name=TDK, Datasheet Link=https://product.tdk.com/info/en/catalog/datasheets/mlcc_commercial_midvoltage_en.pdf, Height=0.9mm, Manufacturer_Part_Number=C1608X7S1A475K080AC
.D1 .D2 .D3: "Diode", Manufacturer_Name="ON Semiconductor", Mouser2 Part Number=863-MBR0530T1G, Datasheet Link=https://componentsearchengine.com//MBR0530T1G.pdf, Height=1.35mm, Manufacturer_Part_Number=MBR0530T1G, Mouser2 Price/Stock=https://www.mouser.com/Search/Refine.aspx?Keyword=863-MBR0530T1G
.IC1: "Integrated Circuit", Manufacturer_Name="Texas Instruments", Datasheet Link=http://www.ti.com/lit/gpn/tlv62569a, Height=0.6mm, Manufacturer_Part_Number=TLV62569ADRLR
.IC2: "Integrated Circuit", Manufacturer_Name=STMicroelectronics, Mouser2 Part Number=511-SPV1050TTR, Datasheet Link=https://componentsearchengine.com//SPV1050TTR.pdf, Height=1mm, Manufacturer_Part_Number=SPV1050TTR, Mouser2 Price/Stock=https://www.mouser.com/Search/Refine.aspx?Keyword=511-SPV1050TTR
.IC3: "Integrated Circuit", Manufacturer_Name="Silicon Labs", Manufacturer_Part_Number=CP2102-GMR, Datasheet Link=https://www.silabs.com/Support%20Documents/TechnicalDocs/CP2102-9.pdf, Height=1mm
.IC4: "Integrated Circuit", Manufacturer_Name="Espressif Systems", Manufacturer_Part_Number=ESP32-S2-WROVER(M22S2H3216PH3Q0), Datasheet Link=https://www.espressif.com/sites/default/files/documentation/esp32-s2-wrover_esp32-s2-wrover-i_datasheet_en.pdf, Height=3.45mm
.J1 .J23 .J24 J22: "Connector", Manufacturer_Name=Amphenol
  .J1: Datasheet Link=https://www.mouser.co.uk/datasheet/2/18/10117319-1361747.pdf, Height=2mm, Manufacturer_Part_Number=SFV24R-4STE1HLF
  .J23 .J24: Datasheet Link=https://cdn.amphenol-icc.com/media/wysiwyg/files/drawing/10129378.pdf, Height=8.58mm, Manufacturer_Part_Number=10129378-920001BLF
  J22: Datasheet Link=https://cdn.amphenol-icc.com/media/wysiwyg/files/drawing/10118194.pdf, Height=2mm, Manufacturer_Part_Number=10118194-0011LF
.J2 .J6 .J7 .J8: "Connector", Manufacturer_Name="Wurth Elektronik", Mouser2 Part Number=710-61300311121, Datasheet Link=https://componentsearchengine.com//61300311121.pdf, Height=8.69mm, Manufacturer_Part_Number=61300311121, Mouser2 Price/Stock=https://www.mouser.com/Search/Refine.aspx?Keyword=710-61300311121
.J3 .J4 .J5 .J9 .J10 .J11 .J12 .J13 .J14 .J15 .J16 .J17 .J18 .J19 .J20 .J21 .J25 .J26: "Connector", Manufacturer_Name=Molex, Mouser2 Part Number=538-22-28-4027, Datasheet Link=https://componentsearchengine.com//22-28-4027.pdf, Height=10.67mm, Manufacturer_Part_Number=22-28-4027, Mouser2 Price/Stock=https://www.mouser.com/Search/Refine.aspx?Keyword=538-22-28-4027
.L1: "Inductor", Manufacturer_Name="TAIYO YUDEN", Arrow Part Number=LB2016T680K, Datasheet Link=https://www.arrow.com/en/products/lb2016t680k/taiyo-yuden, Height=1.8mm, Manufacturer_Part_Number=LB2016T680K
.L2: "Inductor", Manufacturer_Name=Bourns, Datasheet Link=https://www.bourns.com/pdfs/SRN8040.pdf, Height=4mm, Manufacturer_Part_Number=SRN8040-1R0Y
.L3: "Inductor", Manufacturer_Name=COILCRAFT, Mouser2 Part Number=994-LPS4018-223MRC, Datasheet Link=https://componentsearchengine.com//LPS4018-223MRC.pdf, Height=1.8mm, Manufacturer_Part_Number=LPS4018-223MRC, Mouser2 Price/Stock=https://www.mouser.com/Search/Refine.aspx?Keyword=994-LPS4018-223MRC
.Q1: "MOSFET (N-Channel)", Manufacturer_Name=Vishay, Mouser2 Part Number=78-SI1308EDL-T1-GE3, Datasheet Link=https://componentsearchengine.com//SI1308EDL-T1-GE3.pdf, Height=1.1mm, Manufacturer_Part_Number=Si1308EDL-T1-GE3, Mouser2 Price/Stock=https://www.mouser.com/Search/Refine.aspx?Keyword=78-SI1308EDL-T1-GE3
.Q2 Q6: "Transistor BJT PNP", Manufacturer_Name="ON Semiconductor", Mouser2 Part Number=863-BC858CLT3G, Datasheet Link=https://componentsearchengine.com//BC858CLT3G.pdf, Manufacturer_Part_Number=BC858CLT3G, Mouser2 Price/Stock=https://www.mouser.com/Search/Refine.aspx?Keyword=863-BC858CLT3G
.Q3 .Q4 .Q5 Q7: "Transistor BJT PNP", Manufacturer_Name="ON Semiconductor", Datasheet Link=https://www.onsemi.com/pub/Collateral/BC856ALT1-D.PDF, Height=1.11mm, Manufacturer_Part_Number=BC858BLT3G
.R1: library part R_0805, "Resistor", Manufacturer_Name=Vishay, Datasheet Link=http://www.vishay.com/docs/20035/dcrcwe3.pdf, Height=0.4mm
.R2 .R4 .R5 .R6 .R7 .R8 .R9 .R10 .R11 .R12 .R13 .R14 .R15 .R16 .R17 .R18 .R19 .R20 .R21 .R22 .R23 .R24 .R25 .R26 .R27 .R28 .R29 .R30 R31 R32 R33 R34 R35 R36 R37 R38: "Resistor", Manufacturer_Name=Vishay, Datasheet Link=http://www.vishay.com/docs/20035/dcrcwe3.pdf, Height=0.4mm
.R3: library part CRCW0402100KFKED, "Resistor", Manufacturer_Name=Vishay, Datasheet Link=http://www.vishay.com/docs/20035/dcrcwe3.pdf, Height=0.4mm, Manufacturer_Part_Number=CRCW0402100KFKED
.S1 .S2: "Switch", Manufacturer_Name=E-Switch, Mouser2 Part Number=612-LL3301NF065QG, Datasheet Link=https://componentsearchengine.com//LL3301NF065QG.pdf, Height=4mm, Manufacturer_Part_Number=LL3301NF065QG, Mouser2 Price/Stock=https://www.mouser.com/Search/Refine.aspx?Keyword=612-LL3301NF065QG
C14: "Capacitor Polarised", Manufacturer_Name=Elna, Mouser2 Part Number=555-DB-5R5D105T, Datasheet Link=https://componentsearchengine.com//DB-5R5D105T.pdf, Height=8mm, Manufacturer_Part_Number=DB-5R5D105T, Mouser2 Price/Stock=https://www.mouser.com/Search/Refine.aspx?Keyword=555-DB-5R5D105T

## Via types
v1: diameter 50, hole 28, Top Layer to Bottom Layer, 81 vias

## Nets (pads, with @x,y where several pads share a name; then routed paths per layer and width w, separated by ;. In a path a pad name is that pad's centre, name@x,y a point inside that pad or via, vN(x,y) a via of type N, cw(c..) or ccw(c..) an arc to the next point about the centre after c; other vN are vias at no path point)
#EN: .J13.2 .Q4.3 | length 815.9
  Top Layer w10: .Q4.3 v1@3053.66,708.66
  Bottom Layer w10: v1(3055,710) 3100,755 3459.73,755 .J13.2
B\A\T\T\_\C\H\G\: .IC2.7 .J11.1 | length 2177.4
  Top Layer w7.5: .IC2.7 434.99,3214.07 458.37,3214.07 471.5,3200.94 471.5,3048.5 505,3015 820,3015 v1(865,3060) ; v1(863.58,2792.7) 1432.3,2792.7 1740,2485 .J11.1
  Bottom Layer w7.5: v1(863.58,2792.7) 863.58,3058.58 v1(865,3060)
B\A\T\T\_\C\O\N\N\: .IC2.8 .J9.1 | length 2066.9
  Top Layer w7.5: .IC2.8 470,3230 485,3215 485,3065 515,3035 745,3035 v1(775,3065) ; v1(775,2875) 1485,2875 1740,2620 .J9.1
  Bottom Layer w7.5: v1(775,2875) v1(775,3065)
BS: .J1.8 .R1.1 .R2.2 | length 518.9
  Top Layer w6: .R1.1 .R2.2 887.6,482.6 900,495 1019.25,495 1031.39,482.86 1031.39,378.61 1061.42,348.58 .J1.8
BUSY: .J1.9 .J20.2 | length 4000.6
  Top Layer w6: .J1.9 1081.1,226.1 990,135 740,135 700,175 700,615 1695,1610 1840,1755 v1(1840,1935)
  Bottom Layer w6: v1(1840,1935) 1725,2050 1725,2754.25 .J20.2
CS: .J1.12 .J17.2 | length 3323.3
  Top Layer w6: v1(1118.43,73.83) 1118.83,73.83 1165,120 1165,180 1140.16,204.84 .J1.12
  Bottom Layer w6: v1(1118.43,73.83) 721.17,73.83 570,225 570,1045 1005,1480 1945,1480 .J17.2
D+: .IC3.4 J22.3 | length 211.3
  Top Layer w6: v1(3397.2,314.45) 3424.12,341.36 .IC3.4
  Bottom Layer w6: v1(3397.2,314.45) 3427.76,283.89 J22.3
D-: .IC3.5 J22.2 | length 194.9
  Top Layer w6: .IC3.5 3443.8,339.76 3457.2,326.36 v1(3457.2,314.45)
  Bottom Layer w6: J22.2@3452.8,194.77 v1@3452.8,310.04
  Bottom Layer w10: v1@3452.8,310.04 v1(3457.2,314.45)
D/C: .J1.11 .J18.2 | length 3880.8
  Top Layer w6: .J1.11 1120.47,165.47 1045,90 710,90 630,170 630,735 v1(1730,1835)
  Bottom Layer w6: v1(1730,1835) 1825,1835 1895,1905 1895,2630 .J18.2
DTR: .IC3.28 .Q5.2 .R25.2 | length 217.8
  Top Layer w10: .Q5.2 3224.44,377.6 .R25.2 3246.86,364.04 3261.54,378.72 3261.54,381.54 3297.74,417.74 .IC3.28
EN: .C26.2 .IC4.41 .J13.1 .J24.19 .R27.1 .R30.2 | length 3190.7
  Top Layer w6: .R30.2 .R27.1 3522.98,3396.04 3555.45,3396.04 3562.98,3388.5 .C26.2 3590,3305 3670,3225 3670,3153.58 .J24.19
  Top Layer w10: .IC4.41 3422.2,2756.77 3434.92,2769.49 3434.92,2769.92 3465,2800 3465,2948.58 .J24.19
  Bottom Layer w10: .J13.1 3785,1180.27 3785,2891.42 .J24.19
GDR: .J1.2 .Q1.1 .R3.1 | length 1414.6
  Top Layer w6: v1(808.62,400.71) 894.34,315 935,315 943.31,306.69 .J1.2 ; v1(1520,415) 1520,615 1645,740 1645,760 1645,813.07 .Q1.1
  Bottom Layer w6: v1(808.62,400.71) 862.91,455 925,455 965,415 v1(1520,415)
GND: .C2.1 .C3.1 .C4.1 .C5.1 .C6.1 .C7.1 .C8.1 .C9.1 .C10.1 .C11.1 .C12.1 .C13.1 .C15.1 .C16.1 .C17.1 .C18.1 .C19.1 .C20.1 .C21.1 .C22.1 .C23.1 .C24.1 .C25.1 .C26.1 .D2.1 .IC1.2 .IC2.4 .IC2.18 .IC2.19 .IC2.20 .IC2.21 .IC3.3 .IC3.29 .IC4.2 .IC4.26 .IC4.42 .IC4.43 .IC4.44 .IC4.45 .IC4.46 .IC4.47 .IC4.48 .IC4.49 .IC4.50 .IC4.51 .J1.17 .J1.25 .J1.26 .J4.1 .J5.1 .J24.20 .Q2.3 .Q3.2 .R2.1 .R3.2 .R4.1 .R5.1 .R11.2 .R12.1 .R16.2 .R18.2 .R23.1 .R24.1 .S1.3 .S1.4 .S2.3 .S2.4 C14.2 C27.1 C28.1 C29.1 J22.4 J22.5 J22.6 J22.7 J22.8 J22.9 J22.10 J22.11 Q7.2 R32.1 R38.2 | length 459
  Top Layer w6: .J1.17 1238.58,234.01 v1(1277.1,195.49)
  Top Layer w7.5: .IC2.21 391.5,3214.25 .IC2.4
  Top Layer w10: v1(1241.61,730.84) 1242.27,731.5 .C2.1 ; .D2.1 v1(1280,1053.9) ; Q7.2 Q7.2@1460,2051.54 ; .IC3.3 3404.43,457.11 .IC3.29 ; .C23.1 v1(3660,355)
  other v1: 760,220 1540,220 3450,450 3395,505 3610,545 945,575 1077.5,575 1210,575 1342.5,575 1475,575 1554.22,758.78 1665,1085 3330.83,1829.61 1180,1930 105,1935 1460,2115 645,2285 1030,2320 2955.07,2387.05 3078.99,2387.26 620,2510 780,2510 2962.83,2610.35 3080.45,2611.19 2790,2755 3340,2820 365,2930 675,3090 255,3175 90,3185 2885,3190 1310,3200 2885,3245 2885,3300 465,3305 313.26,3479.86 3590,3495 100,3530 620,3530 475,3555 3060,3680
IO0: .J15.2 .Q5.3 | length 3374.3
  Top Layer w6: v1(2975,340) .Q5.3
  Bottom Layer w6: .J15.2 2090.59,3125 2165,3125 2285,3005 2285,1025 2970,340 v1(2975,340)
IO1: .IC4.4 .J23.3 | length 471.2
  Top Layer w6: .J23.3 2615,2865 2615,2680 2655,2640 2720.08,2640 .IC4.4
IO2: .IC4.5 .J20.1 .J23.4 | length 878
  Top Layer w6: .J20.1 2299.25,2880 .J23.4 2585,2795 2585,2650 2655,2580 2721.02,2580 .IC4.5
IO3: .IC4.6 .J21.1 .J23.5 | length 800.2
  Top Layer w6: .J21.1 2244.47,2780 .J23.5 2570,2710 2570,2630 2679.45,2520.55 .IC4.6
IO4: .IC4.7 .J18.1 .J23.6 | length 740.6
  Top Layer w6: .J18.1 2205,2680 .J23.6 2555,2625 2555,2590 2676.4,2468.6 2714.32,2468.6 .IC4.7
IO5: .IC4.8 .J9.2 .J23.7 | length 686.5
  Top Layer w6: .J9.2 2165,2580 .J23.7 2610,2470 2677.56,2402.44 .IC4.8
IO6: .IC4.9 .J11.2 .J23.8 | length 655.1
  Top Layer w6: .J11.2 2495,2485 .J23.8 2636.61,2343.39 .IC4.9
IO7: .IC4.10 .J23.9 .J26.2 | length 654.2
  Top Layer w6: .J26.2 2168.75,2380 .J23.9 2595.67,2284.33 .IC4.10
IO8: .IC4.11 .J14.2 .J23.10 | length 657.4
  Top Layer w6: .J14.2 2217.5,2280 .J23.10 2554.72,2225.28 .IC4.11
IO9: .IC4.12 .J23.11 .J25.2 | length 660.6
  Top Layer w6: .J25.2 2266.25,2180 .J23.11 2707.64,2180 .IC4.12
IO10: .IC4.13 .J23.12 | length 232.7
  Top Layer w6: .J23.12 2501.45,2080 2528.61,2107.17 .IC4.13
IO11: .IC4.14 .J23.13 | length 249.6
  Top Layer w6: .J23.13 2568.11,2048.11 .IC4.14
IO12: .IC4.15 .J23.14 | length 266.6
  Top Layer w6: .J23.14 2609.06,1989.06 .IC4.15
IO13: .IC4.16 .J16.1 .J23.15 | length 704.1
  Top Layer w6: .J16.1 2235,1780 .J23.15 2650,1930 .IC4.16
IO14: .IC4.17 .J19.1 .J23.16 | length 785.1
  Top Layer w6: .J19.1 2170,1680 .J23.16 2720.47,1900.47 .IC4.17
IO15: .IC4.18 .J17.1 .J23.17 | length 908.2
  Top Layer w6: .J17.1 2265,1560 2285,1580 .J23.17 2595,1580 2859.21,1844.21 .IC4.18
IO16: .IC4.19 .J23.18 | length 655.2
  Top Layer w6: .J23.18 2605,1480 2918.27,1793.27 .IC4.19
IO17: .IC4.20 .J23.19 | length 770.9
  Top Layer w6: .J23.19 2590,1380 2977.32,1767.32 .IC4.20
IO18: .IC4.21 .J23.20 | length 912.9
  Top Layer w6: .J23.20 2620,1280 3036.38,1696.38 .IC4.21
IO19: .IC4.22 .J24.1 | length 991.9
  Top Layer w10: .IC4.22 3095.43,1504.57 3320,1280 .J24.1 .J24.1@3595,1278.58
IO20: .IC4.23 .J24.2 | length 844.9
  Top Layer w10: .IC4.23 3154.49,1580.51 3350,1385 3591.42,1385 .J24.2
IO21: .IC4.24 .J24.3 | length 688.3
  Top Layer w10: .IC4.24 3213.54,1676.46 3410,1480 .J24.3
IO26: .IC4.25 .J24.4 | length 557.9
  Top Layer w10: .IC4.25 3272.6,1727.4 3420,1580 .J24.4
IO33: .IC4.27 .J24.5 | length 377.7
  Top Layer w10: .IC4.27 3410.39,1779.61 3510,1680 .J24.5
IO34: .IC4.28 .J24.6 | length 348.8
  Top Layer w10: .IC4.28 3419.45,1980 3450,1980 3470,1960 3470,1830 3520,1780 .J24.6
IO35: .IC4.29 .J24.7 | length 302.5
  Top Layer w10: .IC4.29 3456.89,2048.11 3510,1995 3510,1915 3545,1880 .J24.7
IO36: .IC4.30 .J24.8 | length 268
  Top Layer w10: .IC4.30 3517.83,2107.17 3540,2085 3540,2035 3595,1980 .J24.8
IO37: .IC4.31 .J24.9 | length 221.7
  Top Layer w10: .IC4.31 3510.2,2166.22 .J24.9
IO38: .IC4.32 .J24.10 | length 204.8
  Top Layer w10: .IC4.32 3551.14,2225.28 .J24.10
IO39: .IC4.33 .J24.11 | length 187.8
  Top Layer w10: .IC4.33 3592.09,2284.33 .J24.11
IO40: .IC4.34 .J24.12 | length 202.7
  Top Layer w10: .IC4.34 3410,2343.78 3410,2345 3561.42,2345 .J24.12
IO41: .IC4.35 .J24.13 | length 218.1
  Top Layer w10: .IC4.35 3477.44,2402.44 3553.32,2478.32 3594.74,2478.32 .J24.13
IO42: .IC4.36 .J24.14 | length 235.1
  Top Layer w10: .IC4.36 3423.11,2474.21 3439.21,2474.21 3545,2580 .J24.14
IO45: .IC4.39 .J24.17 | length 327
  Top Layer w10: .IC4.39 3423.11,2651.38 3436.38,2651.38 3515,2730 3515,2800 3595,2880 .J24.17
IO46: .IC4.40 .J24.18 | length 366.6
  Top Layer w10: .IC4.40 3423.11,2710.43 3435.43,2710.43 3485,2760 3485,2868.58 .J24.18
LDO1_3V3: .J6.1 .R21.2 | length 822.9
  Top Layer w7.5: .R21.2 1297.6,3482.4 1400.77,3379.23 .J6.1
LDO2_1V8: .R22.2
Net.C1_1: .C1.1 .D3.2 .L1.2 .Q1.3 | length 309.6
  Top Layer w7.5: .L1.2 1466.5,712.13 1466.5,787.87 1432.16,822.21 1432,822.21 1420,834.21 .D3.2 1562.56,841.1 .Q1.3
Net.C1_2: .C1.2 .D1.1 .D2.2 | length 288.8
  Top Layer w7.5: .D1.1 .D2.2 1318.9,841.1 1380,780 .C1.2
Net.C2_2: .C2.2 .L1.1 | length 81.6
  Top Layer w7.5: .C2.2 1357.73,668.5 1375.63,686.41 .L1.1
Net.C13_2: .C13.2 .L2.2 .R6.1 .R9.2 | length 1049.6
  Top Layer w10: v1(175,2445) 175,2520 235,2580 .R6.1 ; v1@740,2255 v1(740,2275) .R9.2
  Bottom Layer w10: v1(175,2445) 265,2355 545,2355 550,2360 655,2360 v1(740,2275)
Net.C15_2: .C15.2 .IC1.3 .J3.2 .R7.2 .R8.2 | length 1429.6
  Top Layer w9: .R7.2@589.58,2182.41 580.19,2182.41 .R7.2 v1(565,2135) .R8.2
  Bottom Layer w9: v1(485,2500) 560,2500 600,2460 695,2460 845,2310 845,2195 785,2135 v1(565,2135)
Net.C20_2: .C20.2 .IC2.3 | length 111.2
  Top Layer w6: .IC2.3 375.75,3137.2 381.98,3130.97 381.98,3093.02 389.5,3085.51 389.5,3084.13 397.13,3076.5 .C20.2
Net.C21_2: .C21.2 .IC2.12 .R22.1 | length 233.3
  Top Layer w8: .IC2.12 391.5,3341.5 443.5,3393.5 .C21.2@470,3393.5
  Top Layer w10: .C21.2@470,3393.5 .C21.2 530.91,3393.5 .R22.1
Net.C22_2: .C22.2 .IC2.11 .R21.1 | length 362.2
  Top Layer w8: .IC2.11 407.24,3332.24 447.87,3372.87 497.65,3372.87 498.21,3373.44 579.76,3373.44 594.86,3388.54 615.03,3388.54 .C22.2
  Top Layer w10: .C22.2 680.91,3393.5 .R21.1
Net.C23_2: .C23.2 .IC3.6 | length 117.6
  Top Layer w6: .IC3.6 3465.51,380.28 3465.51,358.01 3473.53,350 3543.5,350 .C23.2@3551.38,357.88
Net.J2_1: .J2.1 .R5.2 | length 120.3
  Top Layer w7.5: .R5.2@1532.6,1085 1532.6,1076.14 1548.53,1060.21 1549.79,1060.21 1565,1045 .J2.1
Net.J2_3: .J2.3 .R4.2 | length 119.7
  Top Layer w7.5: .J2.3 1765,1043.96 1781.24,1060.21 1781.47,1060.21 1797.4,1076.14 .R4.2@1797.4,1085
Net.J7_1: .J7.1 .R23.2 | length 123.4
  Top Layer w7.5: .R23.2 1169.68,3094.08 .J7.1
Net.J7_2: .IC2.5 .J7.2 | length 902.3
  Top Layer w6: .IC2.5 407.24,3144.66 435,3116.9 435,3030 480,2985 1091.56,2985 1115,3008.44 .J7.2@1115,3050
Net.J7_3: .J7.3 .R19.1 | length 123.5
  Top Layer w7.5: .J7.3 1010.32,3110.72 1034.81,3135.21 1035.03,3135.21 1050.97,3151.14 .R19.1
Net.J8_1: .J8.1 .R24.2 | length 123.9
  Top Layer w7.5: .R24.2 1169.68,3311.39 .J8.1
Net.J8_2: .IC2.6 .J8.2 | length 1150.7
  Top Layer w6: .IC2.6 434.8,3149.3 455,3129.1 455,3040 498,2997 1028.11,2997 1060,3028.89 1060,3080 1115,3135 1115,3347.35 .J8.2
Net.J8_3: .J8.3 .R20.1 | length 124.1
  Top Layer w7.5: .J8.3 1010.32,3294.09 1034.62,3269.79 1035.03,3269.79 1050.97,3253.86 .R20.1
Net.J14_1: .J14.1 R37.2 | length 441.6
  Top Layer w9: R37.2 1822.6,2117.6 1892.5,2187.5 .J14.1
Net.J25_1: .J25.1 .R10.1 | length 1123.6
  Top Layer w9: .R10.1 1117.4,1801.14 1132.59,1785.96 1134.04,1785.96 1190,1730 1500,1730 1585,1815 1585,1900 1723.75,2038.75 .J25.1
Net.J26_1: .J26.1 R31.1 R32.2 | length 604.4
  Top Layer w9: R31.1 R32.2 1978.75,2290 1995.54,2306.79 .J26.1
Net.L2_1: .IC1.4 .L2.1
Net.L3_1: .IC2.13 .L3.1 .R15.2 | length 1674.1
  Top Layer w7.5: .IC2.13 375.75,3612.32 373.07,3615 393.07,3635 v1(450,3635)
  Bottom Layer w10: v1(128.92,3105) 615,3105 707.29,3197.29 707.29,3322.71 645,3385 495,3385 434.19,3445.81 434.19,3571.53 450,3587.34 v1(450,3635)
Net.Q2_1: .Q2.1 .Q3.3 .R8.1 | length 249.9
  Top Layer w10: .Q2.1 1047.6,2258.66 1058.35,2247.91 1060.32,2247.91 1117.4,2190.83 .R8.1 1117.4,2126.14 1102.72,2111.46 1081.35,2090.09 1081.35,2057.69 .Q3.3@1080,2056.34
Net.Q2_2: .IC1.5 .Q2.2 .R7.1 | length 1108
  Top Layer w10: .IC1.5 566.04,2272.4 573.86,2272.4 588.54,2257.72 588.54,2256.73 675.49,2169.78 875,2169.78 940,2234.78 940,2375 995,2430 1090,2430 1180,2340 1180,2280 1160.63,2260.63 .Q2.2
Net.Q3_1: .Q3.1 .R10.2 .R11.1 | length 158.7
  Top Layer w9: .Q3.1 1042.4,1890.2 .R11.1 .R10.2
Net.Q4_1: .Q4.1 .R25.1 | length 113.8
  Top Layer w10: .Q4.1 3137.78,463.84 3206.16,463.84 3214.46,455.54 3214.46,453.53 3229.14,438.84 .R25.1
Net.Q5_1: .Q5.1 .R26.1 | length 578.2
  Top Layer w7.5: v1(3141.34,246.34) .Q5.1 ; .R26.1 v1(3240,675)
  Bottom Layer w7.5: v1(3141.34,246.34) 3240,345 v1(3240,675)
Net.R9_1: .IC1.1 .R9.1 .R12.2 | length 160.1
  Top Layer w10: .IC1.1 608.45,2436.55 615,2430 647.4,2430 .R12.2 .R9.1
Net.R13_2: .IC2.10 .R13.2 .R14.1 | length 211.2
  Top Layer w7.5: .IC2.10 521.3,3261.5 .R13.2@524.29,3258.5 ; .R13.2 527.6,3249.65 543.53,3233.71 543.76,3233.71 559.64,3217.82 568.28,3217.82 586.47,3199.64 586.47,3190.19 .R14.1
Net.R14_2: .IC2.9 .R14.2 .R16.1 | length 223
  Top Layer w7.5: .IC2.9 474.7,3245.75 511.63,3208.81 511.63,3204.19 ; 511.66,3204.16 511.66,3171.68 .R14.2@518.35,3165 ; .R16.1 .R14.2
Net.R15_1: .IC2.1 .R15.1 .R17.2 | length 253.6
  Top Layer w7.5: .R17.2 203.53,3030.94 203.53,3041.13 222.4,3060 231.26,3060 262.4,3091.14 262.4,3108.86 278.34,3124.79 279.79,3124.79 285,3130 330.57,3130 344.25,3143.68 .IC2.1
Net.R17_1: .IC2.2 .R17.1 .R18.1 | length 211.6
  Top Layer w7.5: .R17.1 262.4,3023.86 278.34,3039.79 279.34,3039.79 288.72,3049.18 295.55,3049.18 310.21,3063.83 310.21,3066.47 326.14,3082.4 .R18.1@340,3082.4
  Top Layer w8: .R18.1@340,3082.4 344.31,3082.4 360,3098.09 .IC2.2
Net.R29_1: .R29.1 .S2.1 .S2.2 | length 472.3
  Top Layer w6: .R29.1 2804.88,3472.4 2806.42,3473.94 .S2.2
Net.R30_1: .R30.1 .S1.1 .S1.2 | length 484.3
  Top Layer w6: .S1.1 3318.58,3447.84 3343.14,3472.4 .R30.1
NetQ6_1: Q6.1 Q7.3 R36.1 | length 270.9
  Top Layer w6: R36.1 1386.23,2028.57 1411.43,2028.57 1471.34,1968.66 Q7.3 1497.4,1856.97 Q6.1
NetQ6_3: Q6.3 R33.2 | length 515.7
  Top Layer w6: R33.2 1315,2025 1335,2005 1402.5,2005 1420,1987.5 1420,1905 1452.01,1872.99 Q6.3
NetQ7_1: Q7.1 R37.1 R38.1 | length 217.3
  Top Layer w6: Q7.1 1535,2189.8 R38.1 1537.2,2192.4 R37.1
NetR31_2: R31.2 R35.1 | length 70.2
  Top Layer w6: R35.1 R31.2
NetR33_1: R33.1 R34.2 | length 100
  Top Layer w6: R33.1 R34.2
NetR34_1: R34.1 R35.2 | length 95
  Top Layer w6: R34.1 R35.2
PREVGH: .C9.2 .D3.1 .J1.21 | length 2309.7
  Top Layer w7.5: .C9.2 1298.33,418.42 1317.32,399.43 .J1.21 1317.32,152.68 1345,125 1548.03,125 1640,216.97 1640,455 1880,695 1880,1125 1855,1150 1480,1150 1420,1090 .D3.1
PREVGL: .C11.2 .D1.2 .J1.23 | length 2550.9
  Top Layer w7.5: .D1.2 1145.6,973.3 1145.6,949.4 1165,930 1445,930 1470,955 1470,1105 1495,1130 1840,1130 1860,1110 1860,705 1620,465 1620,216.06 1548.94,145 1385,145 1356.69,173.31 .J1.23 1356.69,356.69 1416.11,416.11 .C11.2
PV+: .C16.2 .C17.2 .C18.2 .IC2.16 .J5.2 .L3.2
RESE: .J1.3 .J2.2 .Q1.2 | length 1539.8
  Top Layer w6: v1(905,380) 962.99,322.01 .J1.3 ; v1(1517.96,334.61) 1575,391.65 1575,625 1700,750 1700,850 1684.41,865.59 .Q1.2 1646.34,906.5 1665,925.16 .J2.2
  Bottom Layer w6: v1(905,380) 910,375 1163.08,375 1203.48,334.61 v1(1517.96,334.61)
RST: .J1.10 .J21.2 | length 3905.8
  Top Layer w6: .J1.10 1100.79,210.79 1005,115 725,115 665,175 665,670 1785,1790 1785,1940 v1(1845,2000)
  Bottom Layer w6: v1(1845,2000) 1771.96,2073.04 1771.96,2646.43 .J21.2
RTS: .IC3.24 .Q4.2 .R26.2 | length 218.8
  Top Layer w10: .Q4.2 3230,537.6 .R26.2 3248.86,547.6 3263.54,532.91 3263.54,532.51 3299.58,496.48 .IC3.24
RXD0: .IC4.38 .J10.1 .J24.16 | length 2323.8
  Top Layer w10: .IC4.38 3422.2,2579.61 3434.92,2592.32 3434.92,2594.92 3530,2690 3530,2713.58 .J24.16
  Bottom Layer w10: .J10.1 3541.49,1105 3625,1105 3745,1225 3745,2631.42 .J24.16
SCLK: .J1.13 .J16.2 | length 3805.3
  Top Layer w6: .J1.13 1159.84,215.16 1208.44,166.56 v1(1208.44,48.62)
  Bottom Layer w6: v1(1208.44,48.62) 1179.82,20 670,20 495,195 495,1110 960,1575 1710,1575 .J16.2
SDI: .J1.14 .J19.2 | length 3674
  Top Layer w6: .J1.14 1179.53,220.47 1270,130 v1(1270,95)
  Bottom Layer w6: v1(1270,95) 1200,95 1140,35 705,35 530,210 530,1070 990,1530 1830,1530 .J19.2
SMPS_3V3: .J6.3 .R6.2 | length 1292.2
  Top Layer w10: .R6.2 347.4,2812.4 498.56,2963.56 1268.56,2963.56 1400.77,3095.77 .J6.3
TXD0: .IC4.37 .J12.1 .J24.15 | length 2286.9
  Top Layer w10: .IC4.37 3423.11,2533.27 3438.27,2533.27 3585,2680 .J24.15
  Bottom Layer w10: .J12.1 3439.68,1171.43 3616.43,1171.43 3710,1265 3710,2566.42 .J24.15
U0RX: .IC3.25 .J12.2 | length 685.7
  Top Layer w10: .J12.2 3254.92,883.33 3254.92,779.92 3090,615 3090,530 3110,510 3255,510 3288.21,476.79 .IC3.25
U0TX: .IC3.26 .J10.2 | length 1371.6
  Top Layer w10: .IC3.26 3283.4,457.11 3277.54,462.97 3277.54,463.08 3255.41,485.21 3107.18,485.21 3079.07,457.11 3027.89,457.11 3006.45,478.55 3006.45,906.45 3170,1070 3285.87,1070 3345,1010.87 3345,961.49 .J10.2
uC_IO0: .IC4.3 .J15.1 .J23.2 .R28.1 .R29.2 | length 2104.8
  Top Layer w6: .J15.1 2235.59,3080 .J23.2 2630,2950 2630,2745 2675,2700 2719.13,2700 .IC4.3 2812.72,2697.72 2980,2865 2980,3310 2893.31,3396.69 2690.9,3396.69 .R29.2
  Top Layer w9: .R28.1 .R29.2
VBatt+: .IC2.14 .J3.1 .J4.2 Q6.2 R36.2 | length 4388.6
  Top Layer w9: .IC2.14 360,3488.78 330,3518.78 330,3700 360,3730 495,3730 540,3775 .J4.2 540,3890 525,3905 40,3905 30,3895 30,2905 155,2780 363.52,2780 440.91,2857.39 .J3.1 692.61,2857.39 1260,2290 1260,2005 1302.4,1962.6 R36.2 1377.4,1886.97 1401.78,1862.59 1403.75,1862.59 1415,1851.34 Q6.2
VCOM: .C12.2 .J1.24 | length 241.4
  Top Layer w7.5: .J1.24 1376.38,326.38 1475,425 .C12.2
VDD: .C6.2 .J1.18 | length 257.2
  Top Layer w7.5: .C6.2 1121.67,448.33 1258.27,311.73 .J1.18
VDD_3V3: .C5.2 .IC4.1 .J1.15 .J1.16 .J6.2 .J23.1 .R1.2 .R27.2 .R28.2 C14.1 C27.2 C28.2 C29.2 | length 439.4
  Top Layer w7.5: .C5.2@1062.78,466.97 1072.18,466.97 1077.53,461.62 1199.21,339.94 .J1.15 .J1.16
  Top Layer w10: .C5.2 1062.78,387.22 v1@1117.5,332.5
  other v1: 1117.5,337.5 748.78,606.53 1510,3145 1510,3260 2665,3320 2605,3525.91 3521.42,3525.91
VDD_USB: .C24.2 .C25.2 .IC3.7 .IC3.8 J22.1 | length 130.5
  Bottom Layer w6: J22.1 3478.95,238.95 v1(3540,300)
VGH: .C4.2 .J1.5 | length 201.2
  Top Layer w6: .J1.5 1002.36,466.98 .C4.2
VGL: .C3.2 .J1.4 | length 216.2
  Top Layer w6: .C3.2 945,405 982.68,367.32 .J1.4
VPP: .C7.2 .J1.19 | length 240.9
  Top Layer w7.5: .C7.2 1180.56,419.44 1277.95,322.05 .J1.19
VSH: .C8.2 .J1.20 | length 224.7
  Top Layer w7.5: .C8.2 1239.44,405.56 1297.64,347.36 .J1.20
VSL: .C10.2 .J1.22 | length 209
  Top Layer w7.5: .J1.22 1337.01,402.01 1357.22,422.22 .C10.2
VStore: .C19.2 .IC2.15 .R13.1 .R19.2 .R20.2 | length 405.9
  Top Layer w7.5: .C19.2 325,3333.6 v1(321.25,3329.85) 321.83,3329.85 344.06,3307.61 344.06,3289.24 .IC2.15
  Bottom Layer w7.5: v1(321.25,3329.85) 409.85,3329.85 420,3340 620,3340 v1(625,3335)
pads on no net: .IC1.6 .IC2.17 .IC3.1 .IC3.2 .IC3.9 .IC3.10 .IC3.11 .IC3.12 .IC3.13 .IC3.14 .IC3.15 .IC3.16 .IC3.17 .IC3.18 .IC3.19 .IC3.20 .IC3.21 .IC3.22 .IC3.23 .IC3.27 .J1.1 .J1.6 .J1.7

## Polygon pours and split planes (outlines as drawn)
VDD_3V3 on Top Layer "Top Layer-No Net" (solid, pour order 50): 2635,3329.89 2635,3310 2654.89,3290 2695.08,3290 2705,3279.92 2705,2855 2685,2835 2685,2800 2695,2790 2709.92,2790 2745,2790 2755.06,2800 2755.06,3304.94 2710,3350 2665,3350 2654.89,3350
GND on Top Layer "Top Layer-No Net" (solid, pour order 53): 3305.83,1929.61 3355.83,1929.61 3355.83,1814.61 3340.83,1799.61 3320.83,1799.61 3305.83,1814.61
GND on Top Layer "Top Layer-No Net" (solid, pour order 51): 1445,2330 1430,2315 1430,2035 1445,2020 1475,2020 1490,2035 1490,2315 1475,2330
GND on Top Layer "Top Layer-No Net" (solid, pour order 46): 2785,3140 2910,3140 2920,3150 2920,3335 2905,3350 2780,3350 2770,3340 2770,3155
VDD_3V3 on Top Layer "Top Layer-No Net" (solid, pour order 49): 2575,3560 2575,3450 2635,3450 2635,3560
VDD_3V3 on Top Layer "Top Layer-No Net" (solid, pour order 48): 3491.42,3560 3491.42,3450 3551.42,3450 3551.42,3560
VDD_3V3 on Top Layer "Top Layer-No Net" (solid, pour order 47): 1385,3245 1360,3220 1360,3190 1385,3165 1435.75,3165 1495.75,3105 1550,3105 1550,3300 1490,3300 1435,3245
Net.C13_2 on Top Layer "Top Layer-No Net" (solid, pour order 25): 125,2475 220,2475 230,2465 230,2090 230,1970 150,1970 150,2020 110,2060 110,2460
GND on Top Layer "Top Layer-No Net" (solid, pour order 28): 1103.13,1853.79 1093.13,1863.79 1093.13,1998.79 1103.13,2008.79 1168.13,2008.79 1208.13,1968.79 1208.13,1883.79 1178.13,1853.79
VDD_USB on Top Layer "Top Layer-No Net" (solid, pour order 45): 3515,330 3500,315 3500,280 3515,265 3685,265 3750,330 3750,410 3715,445 3570,445 3550,425 3500,425 3500,405 3475.39,404.85 3475.39,361.11 3476.5,360 3505,360 3510,365 3510,375 3540,405 3680,405 3690,395 3690,340 3670,320 3570,320 3560,330
GND on Top Layer "Top Layer-No Net" (solid, pour order 44): 3555,475 3560,470 3670,470 3675,475 3675,535 3630,580 3590,580 3555,545
GND on Top Layer "Top Layer-No Net" (solid, pour order 38): 1390,270 1395,275 1550,275 1570,255 1570,185 1550,165 1395,165 1390,170
GND on Top Layer "Top Layer-No Net" (solid, pour order 41): 1575,1060 1580,1055 1750,1055 1754.82,1059.82 1755.02,1110.17 1750,1115 1580,1115 1575,1110
GND on Top Layer "Top Layer-No Net" (solid, pour order 40): 1525.75,735 1530.75,730 1625.75,730 1625.75,790 1530.75,790 1525.75,785
VDD_3V3 on Top Layer "Top Layer-No Net" (solid, pour order 39): 725,635 720,630 720,535 780,535 780,630 775,635
GND on Top Layer "Top Layer-No Net" (solid, pour order 37): 910,170 905,165 750,165 730,185 730,255 750,275 905,275 910,270
GND on Top Layer "Top Layer-No Net" (solid, pour order 36): 805,515 800,520 800,600 805,605 1490,605 1510,585 1510,520 1505,515
GND on Top Layer "Top Layer-No Net" (solid, pour order 34): 3440,2845 3440,2795 3325,2795 3310,2810 3310,2830 3325,2845
GND on Top Layer "Top Layer-No Net" (solid, pour order 33): 2925,2630 2925,2365 2930,2360 3105,2360 3110,2365 3110,2629.55 3099.55,2640 2935,2640
GND on Top Layer "Top Layer-No Net" (solid, pour order 32): 2690,2730 2690,2780 2805,2780 2820,2765 2820,2745 2805,2730
GND on Top Layer "Top Layer-No Net" (solid, pour order 31): 3560,3530 3560,3440 3620,3440 3620,3530
GND on Top Layer "Top Layer-No Net" (solid, pour order 30): 2950,3875 2950,3390 3175,3390 3175,3875
GND on Top Layer "Top Layer-No Net" (solid, pour order 27): 988.79,2298.13 998.79,2288.13 1133.79,2288.13 1143.79,2298.13 1143.79,2341.21 1081.87,2403.13 1018.79,2403.13 988.79,2373.13
GND on Top Layer "Top Layer-No Net" (solid, pour order 24): 85,2010 75,2000 75,1915 85,1905 125,1905 135,1915 135,2000 125,2010
Net.L2_1 on Top Layer "Top Layer-No Net" (solid, pour order 23): 550,2390 540,2400 350,2400 335,2385 335,2055 345,2045 445,2045 475,2075 475,2275.24 550,2350.24
GND on Top Layer "Top Layer-No Net" (solid, pour order 21): 575,2615 575,2465 560,2450 560,2395 565,2390 600,2390 605,2385 605,2260 655,2210 790,2210 840,2260 840,2620 815,2645 605,2645
Net.C15_2 on Top Layer "Top Layer-No Net" (solid, pour order 20): 550,2425 550,2460 560,2470 560,2780 540,2800 470,2800 450,2780 450,2475 500,2425
GND on Top Layer "Top Layer-No Net" (solid, pour order 15): 1220,3275 1220,3130 1225,3125 1315,3125 1340,3150 1340,3250 1315,3275
GND on Top Layer "Top Layer-No Net" (solid, pour order 14): 305,3425 345,3425 345,3485 320,3510 290,3510 285,3505 285,3445
PV+ on Top Layer "Top Layer-No Net" (solid, pour order 0): 175,3890 175,3425 215,3385 215,3225 253.38,3225 285.8,3257.42 330,3257.42 330,3270 280,3320 280,3889.87
GND on Top Layer "Top Layer-No Net" (solid, pour order 13): 305,3030 425,3030 425,2915 410,2900 320,2900 305,2915
VStore on Top Layer "Top Layer-No Net" (solid, pour order 12): 570,3340 570,3235 585,3220 855,3220 945,3130 1000,3130 1000,3275 985,3290 755,3290 670,3375 605,3375
Net.L3_1 on Top Layer "Top Layer-No Net" (solid, pour order 11): 100,3135 160,3135 165,3130 210,3130 210,3070 165,3070 160,3065 100,3065
GND on Top Layer "Top Layer-No Net" (solid, pour order 10): 590.91,3115 650.91,3115 660.91,3125 700.91,3125 710.91,3115 710.91,3065 700.91,3055 655.91,3055 645.91,3065 590.91,3065
GND on Top Layer "Top Layer-No Net" (solid, pour order 1): 340,3265 340,3235 295,3235 265,3205 215,3205 180,3240 179.13,3390.87 165.47,3407.1 165,3890 55,3890 50,3885 50,3175 80,3145 285,3145 335,3195 410,3195 410,3265
GND on Top Layer "Top Layer-No Net" (solid, pour order 7): 595,3445 595,3505 585,3515 585,3555 595,3565 645,3565 655,3555 655,3510 645,3500 645,3445
GND on Top Layer "Top Layer-No Net" (solid, pour order 6): 450,3465 475,3490 475,3510 445,3540 445,3580 450,3585 500,3585 510,3575 510,3445 450,3445
GND on Top Layer "Top Layer-No Net" (solid, pour order 4): 535,3300 500,3300 475,3275 450,3275 440,3285 440,3315 475,3350 535,3350
GND on Bottom Layer "Top Layer-No Net" (solid, pour order 52): 3490,160 3495,165 3495,215 3510,230 3595,230 3615,210 3615,70 3580,35 3260,35 3240,55 3240,205 3270,235 3400,235 3410,225 3410,165 3415,160
GND on Layer 3 (split plane): 3914.9,20.1 20.1,20.1 20.1,3914.9 3914.9,3914.9
VDD_3V3 on Layer 2 (split plane): 3914.9,20.1 20.1,20.1 20.1,3914.9 3914.9,3914.9

## Other copper
Top Layer:
  text "E-Label" at 1990,460 h60
  text "V1.0" at 1990,350 h60
  text "AFY" at 1990,245 h60

## Silkscreen, mask and mechanical layers (free items; w line width, h text height)
Top Overlay:
  lines w10: 845,1790 845,2500 1165,2500 1225,2440 1225,1715 920,1715 845,1790 ; 1240,1750 1240,2465 1620,2465 1710,2375 1710,1715 1275,1715 1240,1750
Mechanical 15:
  the board outline again, w10